# Altium PCB FPGA_Core_FX3.PcbDoc (part 1 of 2)
Units mm, origin at the board's own origin, x right, y up, seen from the top; angles counter-clockwise.
Board outline 27 x 27 mm, 6 copper layers (Signal_T, GND_T, PWR, Signal_INT, GND_B, Signal_B), stack 0.816 mm thick; 82 components, 137 nets, 677 pads, 343 vias.
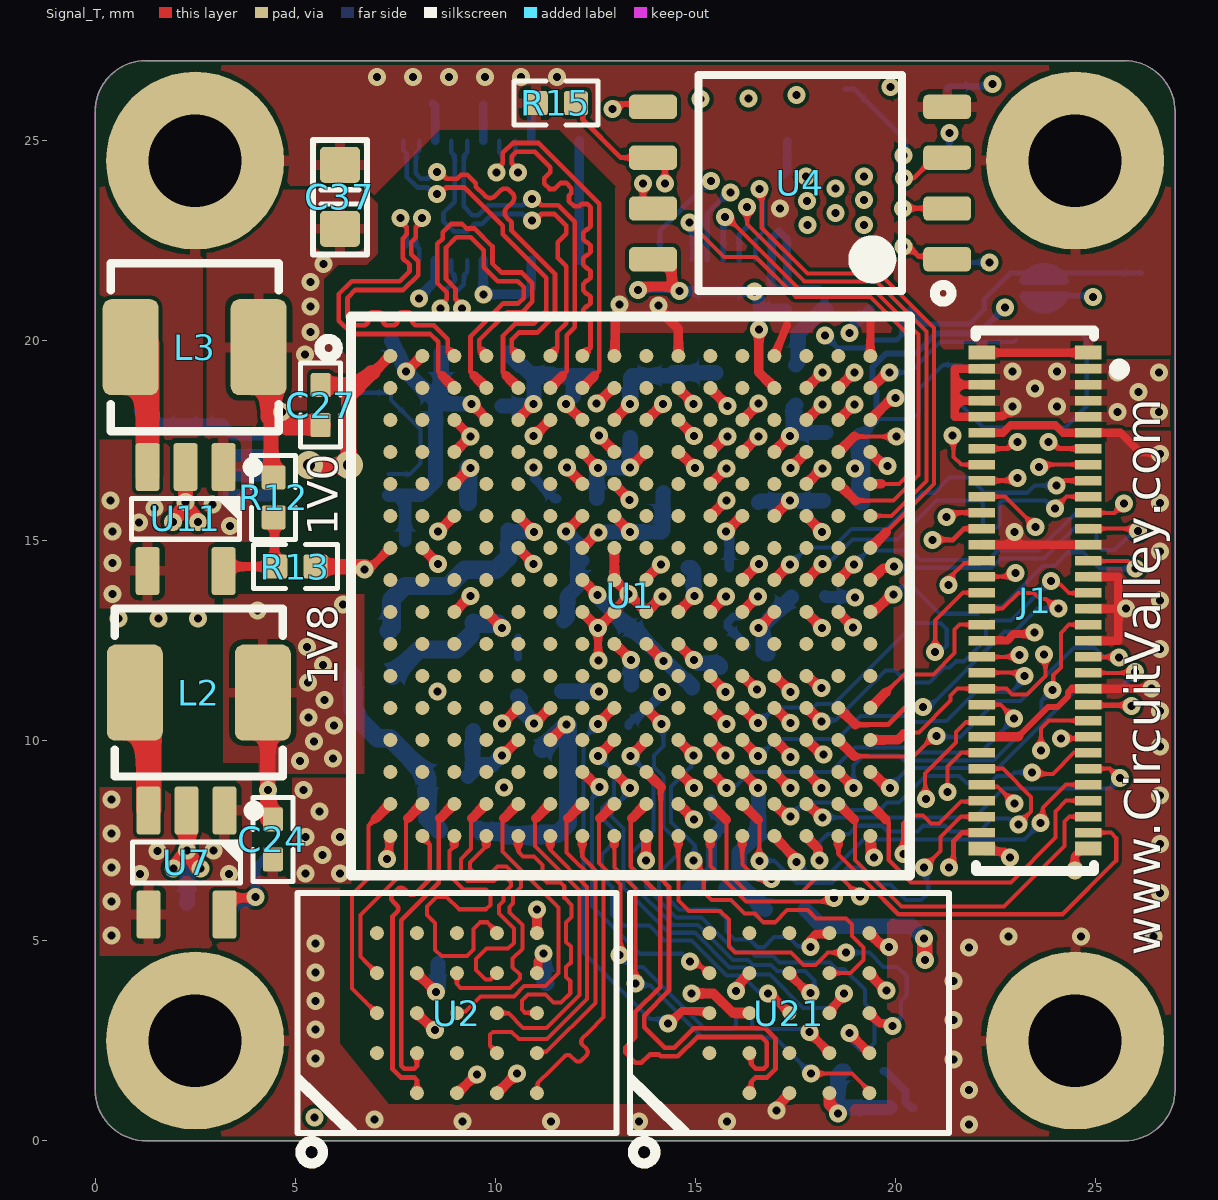
[diagram p0: Signal_T view]
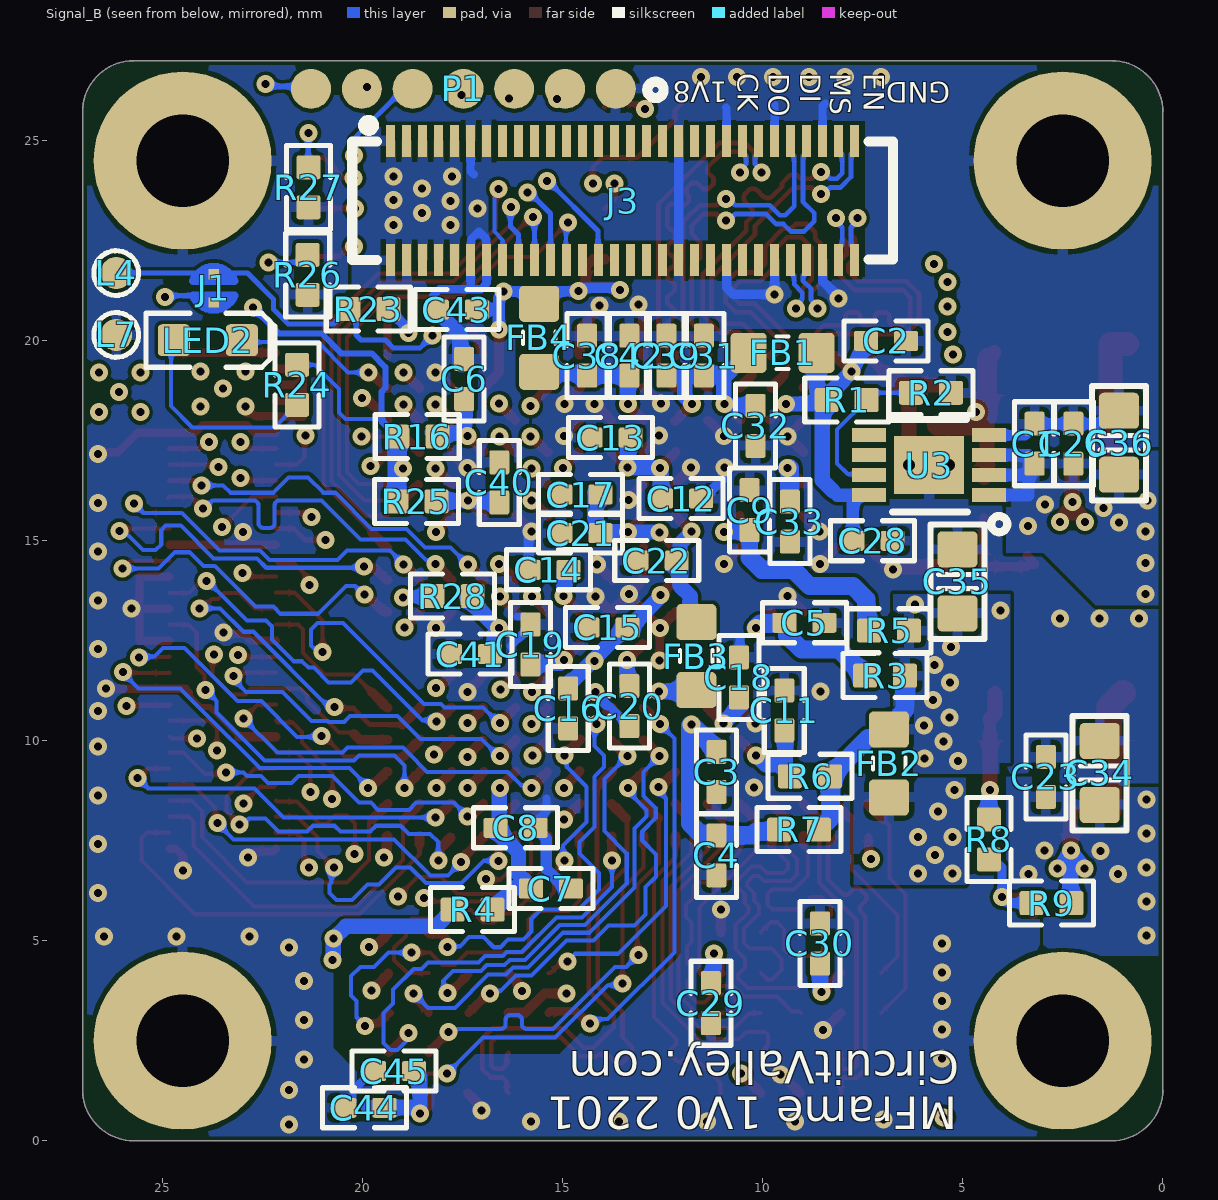
[diagram p1: Signal_B view, seen from below]
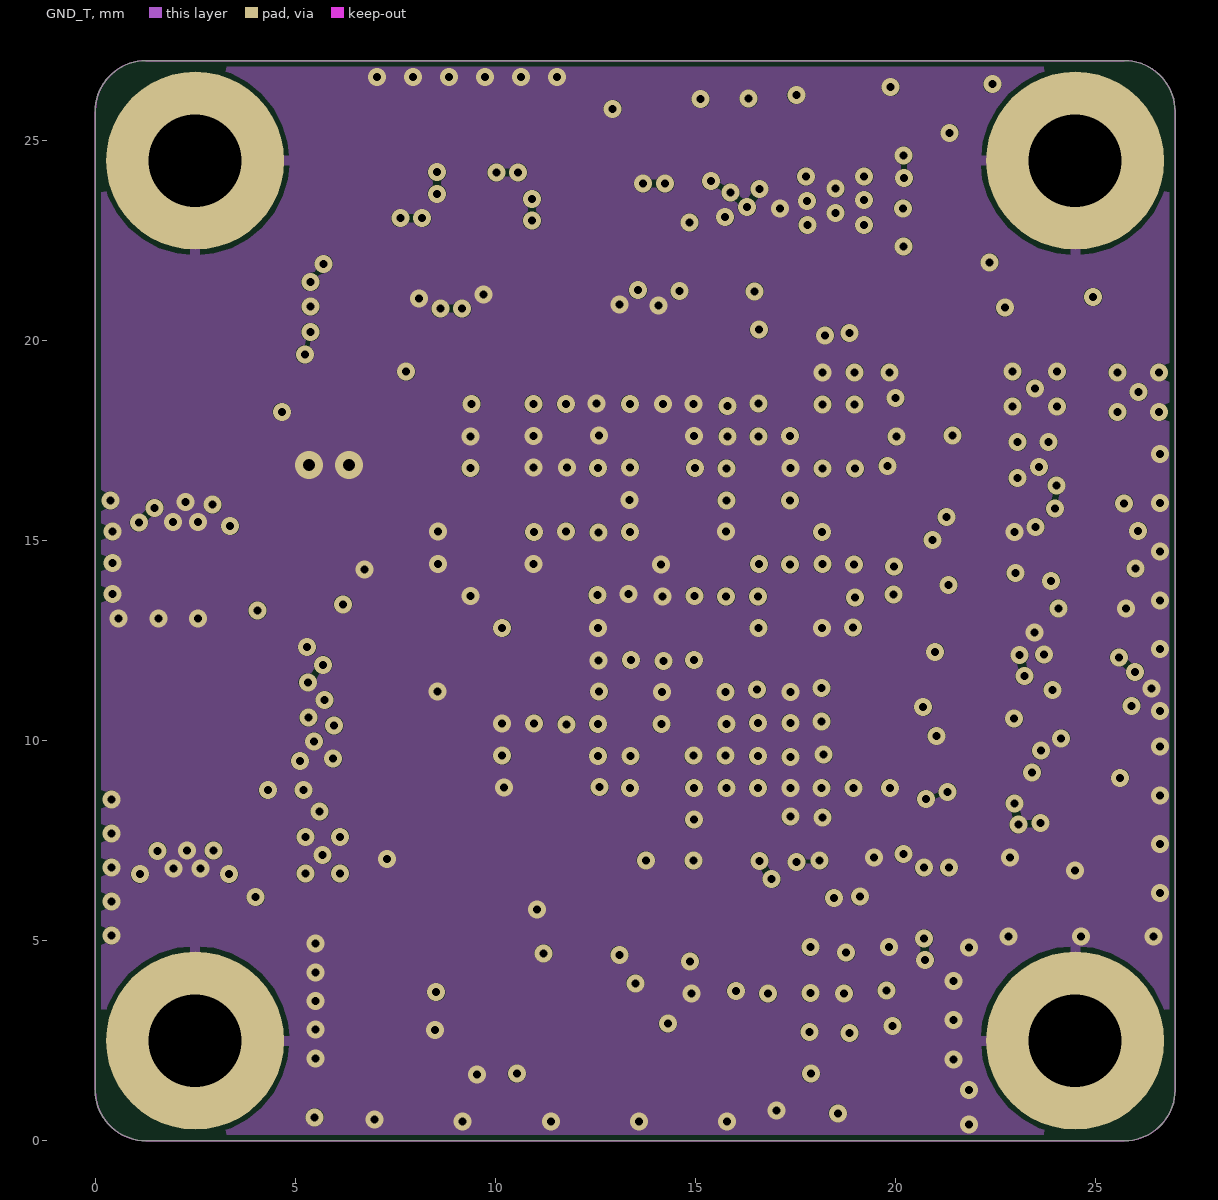
[diagram p2: GND_T]
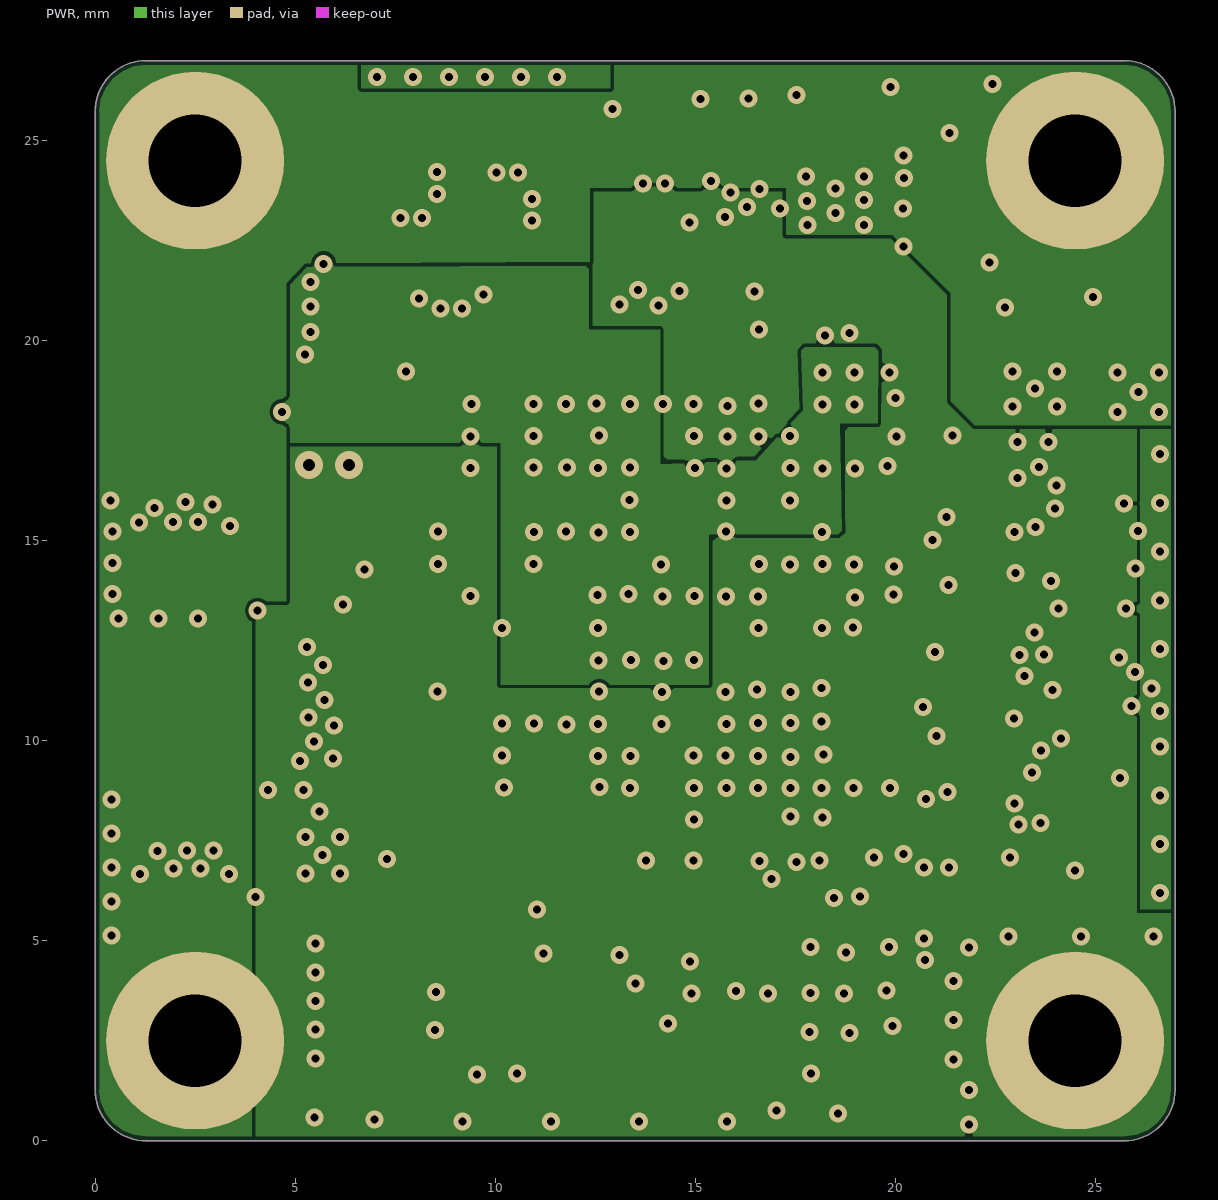
[diagram p3: PWR]
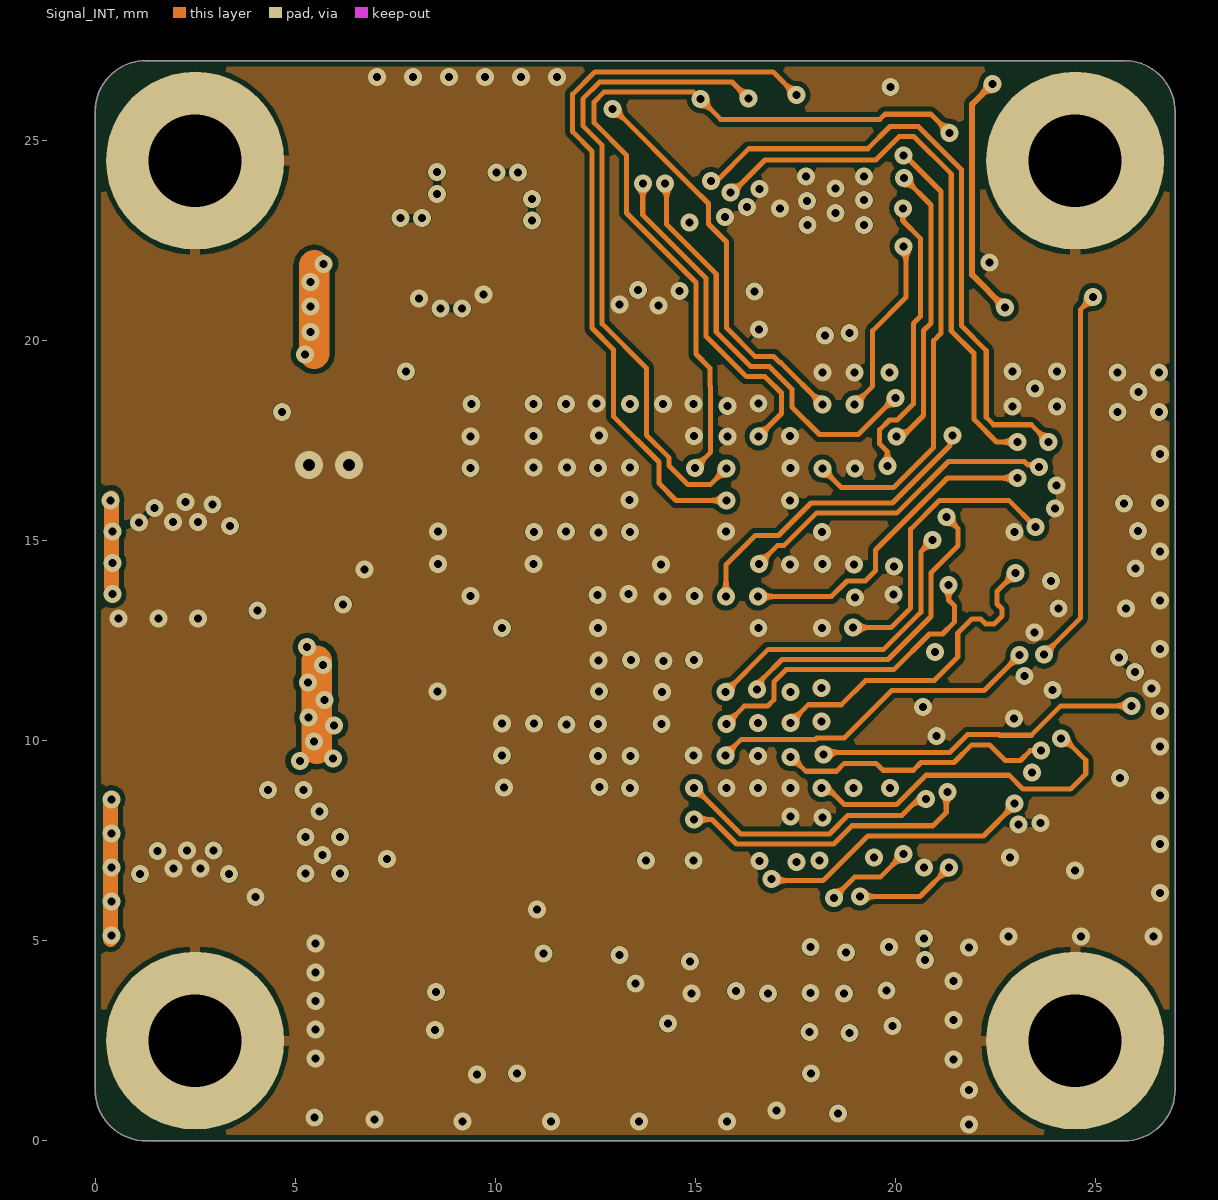
[diagram p4: Signal_INT]
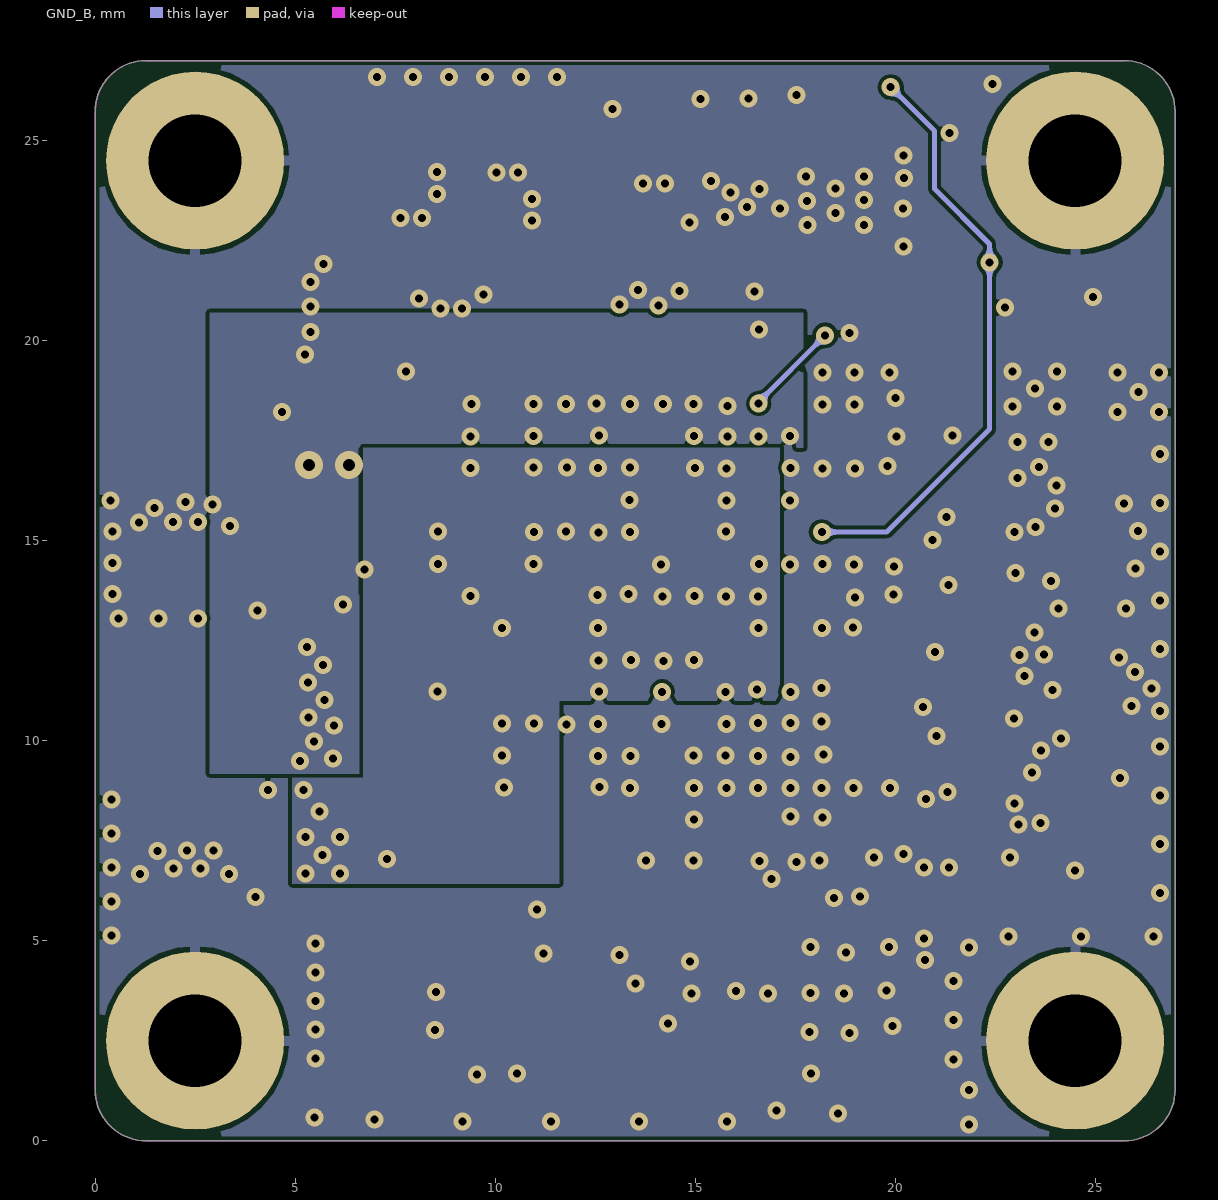
[diagram p5: GND_B]
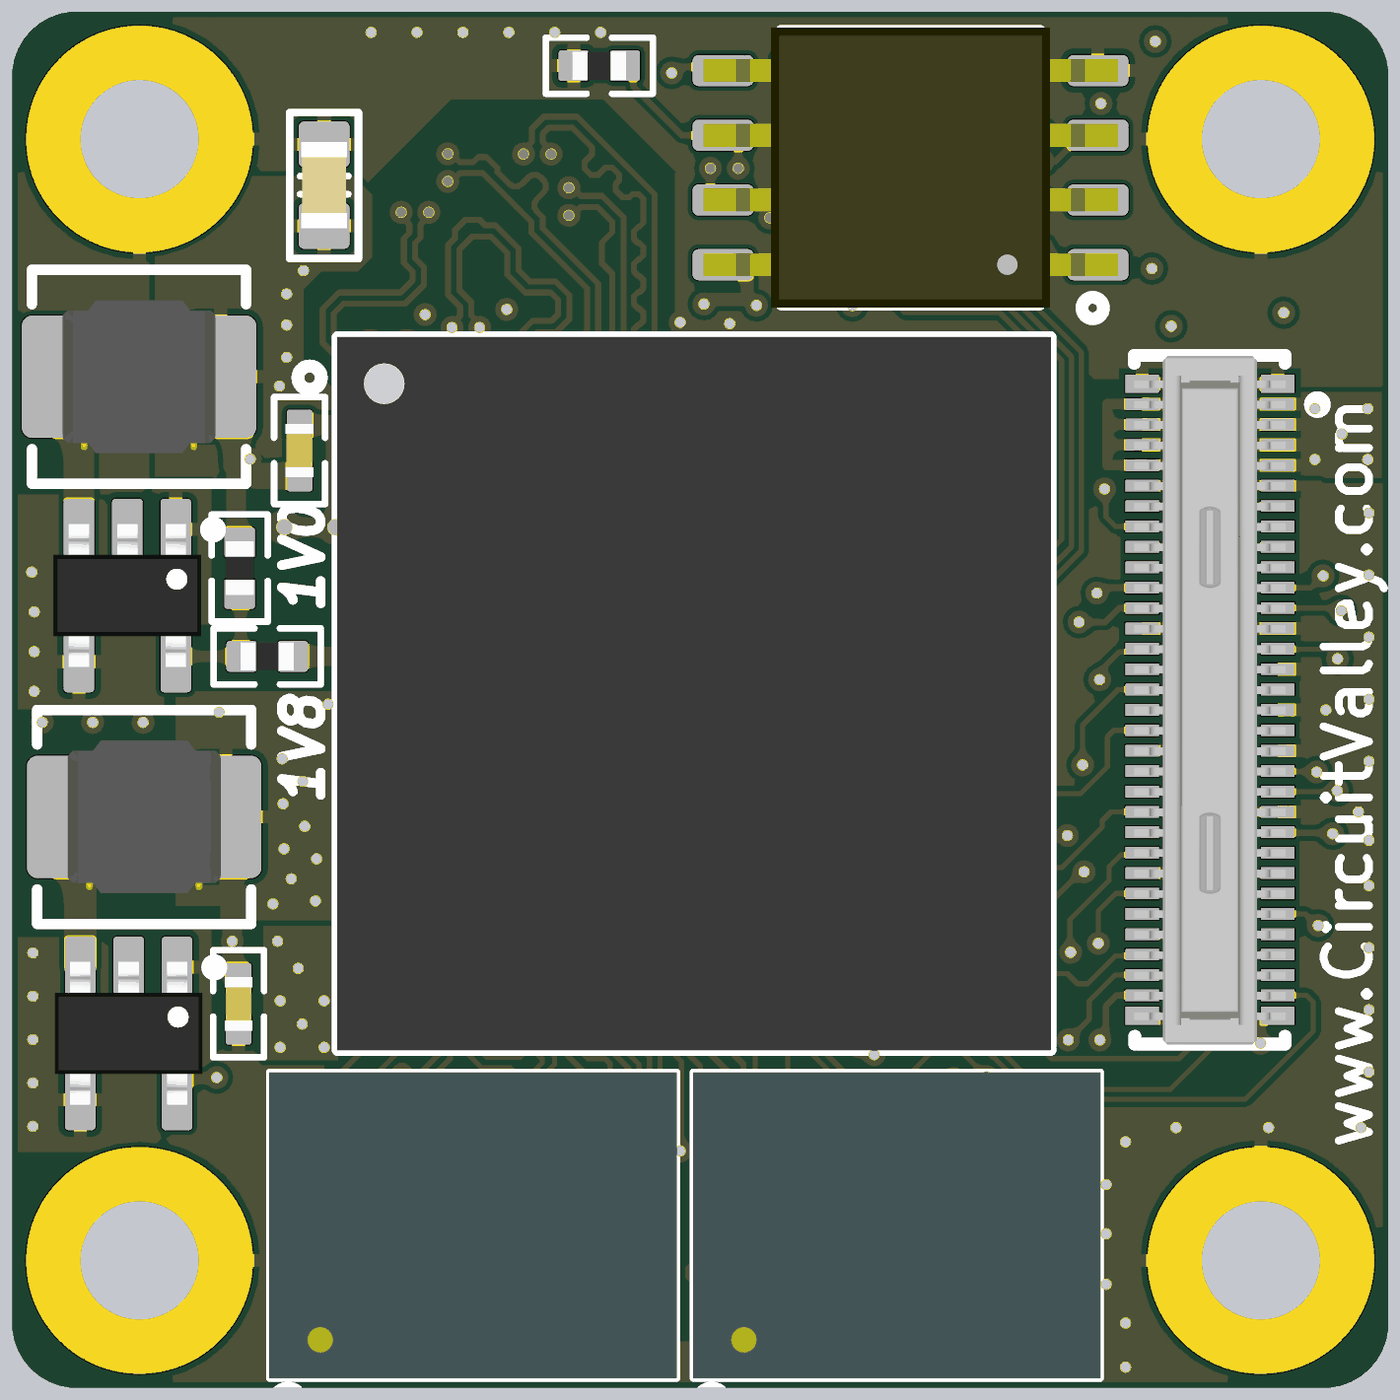
[diagram p7: 3D render of the assembled board from above, using the file's embedded part models]
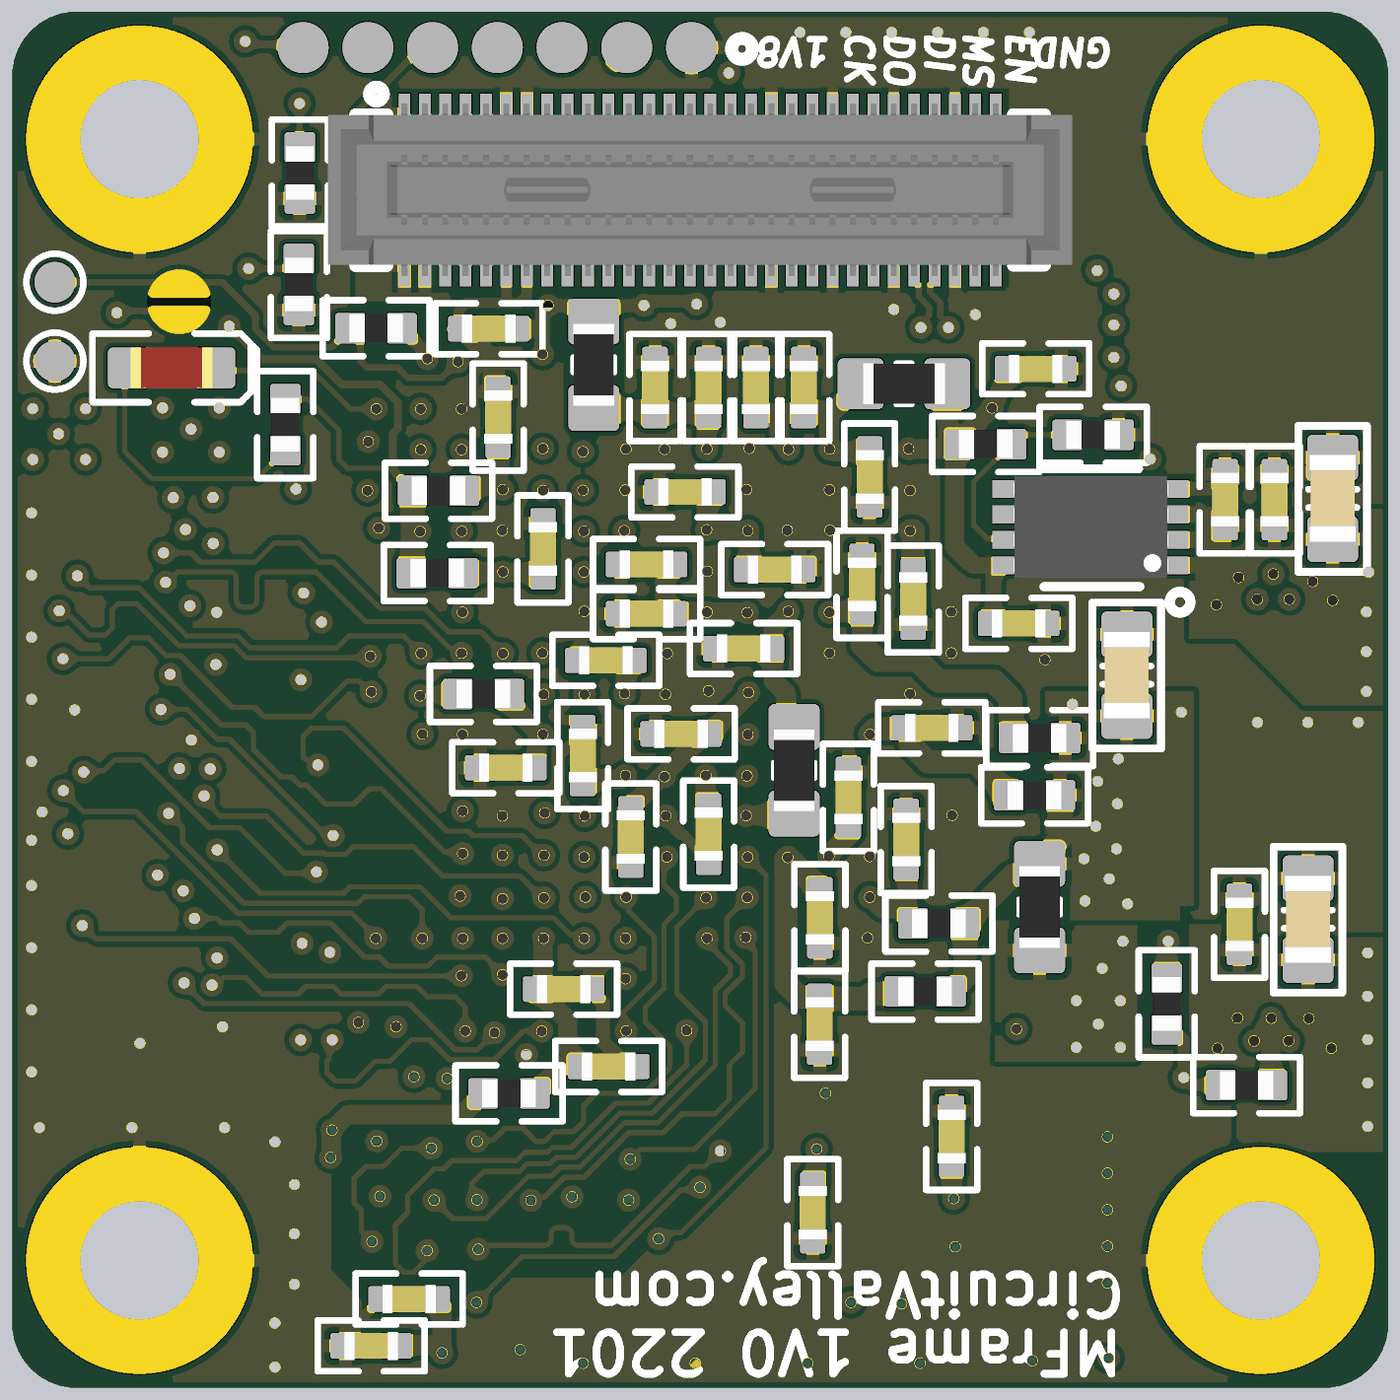
[diagram p8: 3D render of the assembled board from below, using the file's embedded part models]

## Layer stack, top to bottom
Top Solder: solder mask 0.0102, Solder Resist, Dk 3.5
Signal_T: signal copper 0.0356
Dielectric 2: prepreg 0.0711, PP-006, Dk 4.1
GND_T: signal copper 0.035
Dielectric 4: prepreg 0.0711, PP-006, Dk 4.1
PWR: signal copper 0.035
Dielectric 1: dielectric 0.32, FR-4, Dk 4.8
Signal_INT: signal copper 0.035
Dielectric 5: prepreg 0.0711, PP-006, Dk 4.1
GND_B: signal copper 0.035
Dielectric 3: prepreg 0.0711, PP-006, Dk 4.1
Signal_B: signal copper 0.0356
Bottom Solder: solder mask 0.0102, Solder Resist, Dk 3.5

## Board outline
0,1.27 0,25.73 cw(c1.27,25.73) 1.27,27 25.73,27 cw(c25.73,25.73) 27,25.73 27,1.27 cw(c25.73,1.27) 25.73,0 1.27,0 cw(c1.27,1.27)

## Design rules (kind name [scope] priority, off if disabled: settings)
Clearance Clearance_GNDT [OnLayer('GND_T')] p1: gap=0.127 ignorepadtopadclearanceinfootprint=FALSE
Clearance Clearance_INT [OnLayer('Signal_INT')] p2: gap=0.127 ignorepadtopadclearanceinfootprint=FALSE
Clearance [All] p3: gap=0.091 ignorepadtopadclearanceinfootprint=FALSE
Clearance Clearance_PWR [OnLayer('PWR')] p4: gap=0.127 ignorepadtopadclearanceinfootprint=FALSE
Clearance Clearance_GNDB [OnLayer('GND_B')] p5: gap=0.127 ignorepadtopadclearanceinfootprint=FALSE
ComponentClearance [All] p1: gap=0.254 collisioncheckmode=3 verticalgap=0 showdistances=FALSE
DiffPairsRouting [All] p1: maxlimit=0.102 minlimit=0.102 mostfreqgap=0.102 toplayer_minwidth=0.117 toplayer_maxwidth=0.254 toplayer_prefwidth=0.117 midlayer1_minwidth=0.117 midlayer1_maxwidth=0.254 midlayer1_prefwidth=0.117 midlayer2_minwidth=0.117 midlayer2_maxwidth=0.254 midlayer2_prefwidth=0.117 midlayer3_minwidth=0.117 midlayer3_maxwidth=0.254 midlayer3_prefwidth=0.117 midlayer4_minwidth=0.117 midlayer4_maxwidth=0.254 midlayer4_prefwidth=0.117 bottomlayer_minwidth=0.117 bottomlayer_maxwidth=0.254 bottomlayer_prefwidth=0.117 maxuncoupledlength=12.7
HoleSize [All] p1: absolutevalues=TRUE maxlimit=5 minlimit=0.025 maxpercent=80.000 minpercent=20.000
MatchedLengths Matched_GPIF_GRP [InNetClass('GPIF')] p1: tolerance=1.27 checknetsindiffpair=FALSE checkdiffpairvsdiffpair=TRUE checkxsignals=TRUE checkothers=TRUE
MinimumSolderMaskSliver [All] p1: minsoldermaskwidth=0.001
PlaneClearance [All] p1: clearance=0.152
PlaneConnect PlaneConnect_1 [All] p1: pad.planeconnectstyle=Relief pad.reliefexpansion=0.508 pad.reliefentries=4 pad.reliefconductorwidth=0.254 pad.reliefairgap=0.127 via.planeconnectstyle=Direct via.reliefexpansion=0.508 via.reliefentries=4 via.reliefconductorwidth=0.254 via.reliefairgap=0.254
PolygonConnect [All] p1: thpad.connectstyle=Relief thpad.reliefconductorwidth=0.254 thpad.reliefentries=4 thpad.polygonreliefangle="90 Angle" thpad.airgapwidth=0.127 smdpad.connectstyle=Relief smdpad.reliefconductorwidth=0.254 smdpad.reliefentries=4 smdpad.polygonreliefangle="90 Angle" smdpad.airgapwidth=0.127 via.connectstyle=Direct via.reliefconductorwidth=0.254 via.reliefentries=4 via.polygonreliefangle="90 Angle" via.airgapwidth=0.254
RoutingVias [All] p1: holewidth=0.2 width=0.45 viastyle="Through Hole" minholewidth=0.2 minwidth=0.45 maxholewidth=6.3 maxwidth=7
SilkToSilkClearance [All] p1: silktosilkclearance=0
SilkToSolderMaskClearance [IsPad] p1: minsilkscreentomaskgap=0 clearancetoexposedcopper=TRUE
SolderMaskExpansion [All] p1: expansion=0.025 istentingtop=FALSE
Width [All] p1: maxlimit=1.27 minlimit=0.09 preferedwidth=0.127 midlayer1_minwidth=0.127 midlayer2_minwidth=0.127 midlayer3_minwidth=0.127 midlayer4_minwidth=0.127 minimp=50.000000 maximp=50.000000 favimp=50.000000
22 further rules are at their usual default settings.

## Classes and differential pairs
component class fpga_flash: C6 C40 C41 C43 J1 L4 L7 LED2 P1 R15 R16 R23 R24 R25 R26 R27 R28 U4
net class GPIF: FPGA_CLK FPGA_CTL0 FPGA_CTL1 FPGA_D0 FPGA_D1 FPGA_D2 FPGA_D3 FPGA_D4 FPGA_D5 FPGA_D6 FPGA_D7 FPGA_D8 FPGA_D9 FPGA_D10 FPGA_D11 FPGA_D12 FPGA_D13 FPGA_D14 FPGA_D15 FPGA_D16 FPGA_D17 FPGA_D18 FPGA_D19 FPGA_D20 FPGA_D21 FPGA_D22 FPGA_D23 FPGA_D24 FPGA_D25 FPGA_D26 FPGA_D27 FPGA_D28 FPGA_D29 FPGA_D30 FPGA_D31
net class pram1: PS1_CK_N PS1_CK_P PS1_DQ0 PS1_DQ1 PS1_DQ2 PS1_DQ3 PS1_DQ4 PS1_DQ5 PS1_DQ6 PS1_DQ7 PS1_RW
net class pram0: PS0_CK_N PS0_CK_P PS0_DQ0 PS0_DQ1 PS0_DQ2 PS0_DQ3 PS0_DQ4 PS0_DQ5 PS0_DQ6 PS0_DQ7 PS0_RW
net class MIPI1: MIPI1_CLK_N MIPI1_CLK_P MIPI1_D0_N MIPI1_D0_P MIPI1_D1_N MIPI1_D1_P MIPI1_D2_N MIPI1_D2_P MIPI1_D3_N MIPI1_D3_P
net class MIPI0: MIPI0_CLK_N MIPI0_CLK_P MIPI0_D0_N MIPI0_D0_P MIPI0_D1_N MIPI0_D1_P MIPI0_D2_N MIPI0_D2_P MIPI0_D3_N MIPI0_D3_P
component class psram: C3 C4 C29 C30 C44 C45 R7 U2 U21
component class fpga_power: C12 C13 C14 C15 C16 C17 C18 C19 C20 C21 C22 C28 C31 C32 C33 C38 C39 C42 FB1 FB2 FB3 FB4
component class camera: J1 J3
component class power: C1 C2 C23 C24 C26 C27 C34 C35 C36 C37 L2 L3 R1 R2 R8 R9 R12 R13 U3 U7 U11
component class fpga_gpif: C5 C7 C8 C9 C11 R3 R4 R5 R6 U1
differential pair PS1_CK: +PS1_CK_P -PS1_CK_N
differential pair PS0_CK: +PS0_CK_P -PS0_CK_N
differential pair MIPI1_D3: +MIPI1_D3_P -MIPI1_D3_N
differential pair MIPI1_D2: +MIPI1_D2_P -MIPI1_D2_N
differential pair MIPI1_D1: +MIPI1_D1_P -MIPI1_D1_N
differential pair MIPI1_D0: +MIPI1_D0_P -MIPI1_D0_N
differential pair MIPI1_CLK: +MIPI1_CLK_P -MIPI1_CLK_N
differential pair MIPI0_D3: +MIPI0_D3_P -MIPI0_D3_N
differential pair MIPI0_D2: +MIPI0_D2_P -MIPI0_D2_N
differential pair MIPI0_D1: +MIPI0_D1_P -MIPI0_D1_N
differential pair MIPI0_D0: +MIPI0_D0_P -MIPI0_D0_N
differential pair MIPI0_CLK: +MIPI0_CLK_P -MIPI0_CLK_N

## Components (designator, comment, footprint, x,y, rotation, side; value= is the part's Value field where it differs from the comment)
C1 "100n" CAPC1005N 3.202,17.424 r270 bottom
C2 "1uf" CAPC1005N 6.916,19.993 r0 bottom
C3 "100n" CAPC1005N 11.152,9.222 r90 bottom
C4 "100n" CAPC1005N 11.158,7.133 r90 bottom
C5 "100n" CAPC1005N 8.957,12.949 r0 bottom
C6 "100n" CAPC1005N 17.464,19.045 r270 bottom
C7 "100n" CAPC1005N 15.297,6.304 r0 bottom
C8 "100n" CAPC1005N 16.18,7.823 r0 bottom
C9 "100n" CAPC1005N 10.326,15.764 r270 bottom
C11 "100n" CAPC1005N 9.461,10.758 r270 bottom
C12 "100n" CAPC1005N 12.04,16.053 r0 bottom
C13 "100n" CAPC1005N 13.8,17.577 r180 bottom
C14 "100n" CAPC1005N 15.353,14.273 r180 bottom
C15 "100n" CAPC1005N 13.876,12.831 r180 bottom
C16 "100n" CAPC1005N 14.862,10.807 r90 bottom
C17 "100n" CAPC1005N 14.554,16.154 r180 bottom
C18 "100n" CAPC1005N 10.593,11.584 r270 bottom
C19 "100n" CAPC1005N 15.805,12.405 r270 bottom
C20 "100n" CAPC1005N 13.334,10.863 r90 bottom
C21 "100n" CAPC1005N 14.554,15.189 r180 bottom
C22 "100n" CAPC1005N 12.649,14.503 r180 bottom
C23 "100n" CAPC1005N 2.921,9.093 r270 bottom
C24 "100n" CAPC1005N 4.443,7.535 r90 top
C26 "100n" CAPC1005N 2.235,17.424 r270 bottom
C27 "100n" CAPC1005N 5.639,18.39 r270 top
C28 "100n" CAPC1005N 7.25,14.999 r0 bottom
C29 "100n" CAPC1005N 11.294,3.437 r90 bottom
C30 "100n" CAPC1005N 8.568,4.931 r270 bottom
C31 "100n" CAPC1005N 11.47,19.625 r270 bottom
C32 "100n" CAPC1005N 10.176,17.871 r90 bottom
C33 "100n" CAPC1005N 9.322,15.477 r90 bottom
C34 "approved sub OK" CAPC1608N 1.575,9.195 r90 bottom value=10u
C35 "approved sub OK" CAPC1608N 5.131,13.983 r90 bottom value=10u
C36 "approved sub OK" CAPC1608N 1.092,17.45 r90 bottom value=10u
C37 "approved sub OK" CAPC1608N 6.121,23.597 r90 top value=10u
C38 "100n" CAPC1005N 14.388,19.625 r270 bottom
C39 "100n" CAPC1005N 12.407,19.625 r270 bottom
C40 "100n" CAPC1005N 16.586,16.459 r270 bottom
C41 "100n" CAPC1005N 17.315,12.167 r180 bottom
C42 "100n" CAPC1005N 13.335,19.625 r270 bottom
C43 "100n" CAPC1005N 17.648,20.78 r180 bottom
C44 "100n" CAPC1005N 19.957,0.824 r180 bottom
C45 "100n" CAPC1005N 19.213,1.742 r180 bottom
FB1 "Ferrite" INDC1608N 9.502,19.698 r180 bottom
FB2 "Ferrite" INDC1608N 6.842,9.432 r90 bottom
FB3 "Ferrite" INDC1608N 11.659,12.116 r270 bottom
FB4 "Ferrite" INDC1608N 15.588,20.072 r90 bottom
J1 "SMD Jumper" SMD_Jumper 23.724,21.311 r270 bottom
J1 "DF40C-60DP-0.4V(51)" DF40C-60DP-0.4V 23.5,13.5 r270 top locked
J3 "DF40HC(4.0)-60DS-0.4V(51)" DF40HC(4.0)-60DS-0.4V(51) 13.503,23.504 r180 bottom locked
L2 "2u2" FDSD0420-H-2R2M 2.591,11.201 r0 top
L3 "2u2" FDSD0420-H-2R2M 2.489,19.837 r0 top
L4 "TestPoint" SMD_test_point 26.162,21.692 r180 bottom
L7 "TestPoint" SMD_test_point 26.162,20.144 r270 bottom
LED2 "Red" LED-0603-RED 23.871,20.012 r180 bottom
P1 "Header" SMD_Solder_points_1.27_x7 17.482,26.295 r0 bottom
R1 "Thick Film" RESC1005N 7.899,18.517 r0 bottom value=0R
R2 "Thick Film" RESC1005N 5.791,18.698 r0 bottom value=0R
R3 "Thick Film" RESC1005N 6.941,11.626 r0 bottom value=0R
R4 "Thick Film" RESC1005N 17.253,5.777 r180 bottom value=0R
R5 "Thick Film" RESC1005N 6.841,12.75 r0 bottom value=0R
R6 "Thick Film" RESC1005N 8.819,9.111 r0 bottom value=0R
R7 "Thick Film" RESC1005N 9.09,7.776 r180 bottom value=0R
R8 "Thick Film" RESC1005N 4.347,7.533 r90 bottom value=30K
R9 "Thick Film" RESC1005N 2.781,5.939 r180 bottom value=15K
R12 "Thick Film" RESC1005N 4.464,16.083 r90 top value=30K
R13 "Thick Film" RESC1005N 5.004,14.351 r180 top value=27K
R15 "Thick Film" RESC1005N 11.519,25.94 r180 top value=0R
R16 "Thick Film" RESC1005N 18.636,17.602 r180 bottom value=0R
R23 "Thick Film" RESC1005N 19.861,20.789 r180 bottom value=0R
R24 "Thick Film" RESC1005N 21.641,18.898 r270 bottom value=0R
R25 "Thick Film" RESC1005N 18.659,15.985 r180 bottom value=0R
R26 "Thick Film" RESC1005N 21.375,21.647 r90 bottom value=0R
R27 "Thick Film" RESC1005N 21.355,23.835 r90 bottom value=0R
R28 "Thick Film" RESC1005N 17.755,13.614 r180 bottom value=0R
U1 "LIFCL-40-9BG256C" Lattice_256_CABGA 13.379,13.62 r0 top locked
U2 "W957D8MFYA5I" TFBGA24 9.045,3.191 r90 top locked
U3 "MCP1725-1802E/MC" DFN8_3x2 5.841,16.887 r0 bottom
U4 "SST26WF064C / MX25U12832F" SOP8 17.625,23.941 r180 top
U7 "AP3417C" SOT23-5 2.286,6.955 r270 top
U11 "AP3417C" SOT23-5 2.261,15.545 r270 top
U21 "W957D8MFYA5I" TFBGA24 17.357,3.191 r90 top locked

## Footprints (in the part's own frame and the unit in brackets; to place one, negate y for a bottom-side part, rotate by r counter-clockwise, add the part's x,y. Pads: shape width x height; smd on the part's side, far side on the other; paste and mask are expansions set on the pad)
CAPC1005N [mm] "Chip Capacitor, Body 1.0x0.5mm, 0402, IPC Medium Density"
  round 0.2 on Mech14: 0(0,0)
  rrect20% 0.6x0.5 smd: 1(-0.5,0) 2(0.5,0)
  Signal_T pour cut-out: -0.2,0.35 0.2,0.35 0.2,-0.35 -0.2,-0.35
  silkscreen extent -1.05,-0.5 1.05,0.5, body extent -0.52,-0.27 0.53,0.28, height 0.55
CAPC1608N [mm] "Chip Capacitor, Body 1.6x0.8mm, 0603, IPC Medium Density"
  round 0.254 on Mech14: 0(0,0)
  rrect25% 0.9x1 smd: 1(-0.8,0) 2(0.8,0)
  silkscreen extent -1.44,-0.67 1.42,0.68, body extent -0.85,-0.45 0.85,0.45, height 0.89
DF40C-60DP-0.4V [mm] "Hiros 60Pin 0.4mm Connector Used with Camera Sensors"
  rect 0.23x0.66 smd: 1(-5.8,1.33) 2(-5.8,-1.33) 3(-5.4,1.33) 4(-5.4,-1.33) 5(-5,1.33) 6(-5,-1.33) 7(-4.6,1.33) 8(-4.6,-1.33) 9(-4.2,1.33) 10(-4.2,-1.33) 11(-3.8,1.33) 12(-3.8,-1.33) 13(-3.4,1.33) 14(-3.4,-1.33) 15(-3,1.33) 16(-3,-1.33) 17(-2.6,1.33) 18(-2.6,-1.33) 19(-2.2,1.33) 20(-2.2,-1.33) 21(-1.8,1.33) 22(-1.8,-1.33) 23(-1.4,1.33) 24(-1.4,-1.33) 25(-1,1.33) 26(-1,-1.33) 27(-0.6,1.33) 28(-0.6,-1.33) 29(-0.2,1.33) 30(-0.2,-1.33) 31(0.2,1.33) 32(0.2,-1.33) 33(0.6,1.33) 34(0.6,-1.33) 35(1,1.33) 36(1,-1.33) 37(1.4,1.33) 38(1.4,-1.33) 39(1.8,1.33) 40(1.8,-1.33) 41(2.2,1.33) 42(2.2,-1.33) 43(2.6,1.33) 44(2.6,-1.33) 45(3,1.33) 46(3,-1.33) 47(3.4,1.33) 48(3.4,-1.33) 49(3.8,1.33) 50(3.8,-1.33) 51(4.2,1.33) 52(4.2,-1.33) 53(4.6,1.33) 54(4.6,-1.33) 55(5,1.33) 56(5,-1.33) 57(5.4,1.33) 58(5.4,-1.33) 59(5.8,1.33) 60(5.8,-1.33)
  rect 0.35x0.66 smd: S1(-6.2,-1.33) S1(-6.2,1.33) S1(6.2,-1.33) S1(6.2,1.33)
  silkscreen extent -6.76,-1.48 6.76,2.24, body extent -6.75,-1.49 6.77,1.48, height 1.1
DF40HC(4.0)-60DS-0.4V(51) [mm] "Hiros 60Pin 0.4mm Connector Used with Camera Sensors"
  rect 0.23x0.8 smd: 1(-5.8,1.49) 2(-5.8,-1.49) 3(-5.4,1.49) 4(-5.4,-1.49) 5(-5,1.49) 6(-5,-1.49) 7(-4.6,1.49) 8(-4.6,-1.49) 9(-4.2,1.49) 10(-4.2,-1.49) 11(-3.8,1.49) 12(-3.8,-1.49) 13(-3.4,1.49) 14(-3.4,-1.49) 15(-3,1.49) 16(-3,-1.49) 17(-2.6,1.49) 18(-2.6,-1.49) 19(-2.2,1.49) 20(-2.2,-1.49) 21(-1.8,1.49) 22(-1.8,-1.49) 23(-1.4,1.49) 24(-1.4,-1.49) 25(-1,1.49) 26(-1,-1.49) 27(-0.6,1.49) 28(-0.6,-1.49) 29(-0.2,1.49) 30(-0.2,-1.49) 31(0.2,1.49) 32(0.2,-1.49) 33(0.6,1.49) 34(0.6,-1.49) 35(1,1.49) 36(1,-1.49) 37(1.4,1.49) 38(1.4,-1.49) 39(1.8,1.49) 40(1.8,-1.49) 41(2.2,1.49) 42(2.2,-1.49) 43(2.6,1.49) 44(2.6,-1.49) 45(3,1.49) 46(3,-1.49) 47(3.4,1.49) 48(3.4,-1.49) 49(3.8,1.49) 50(3.8,-1.49) 51(4.2,1.49) 52(4.2,-1.49) 53(4.6,1.49) 54(4.6,-1.49) 55(5,1.49) 56(5,-1.49) 57(5.4,1.49) 58(5.4,-1.49) 59(5.8,1.49) 60(5.8,-1.49)
  silkscreen extent -6.76,-1.48 6.76,2.01, body extent -7.3,-1.69 7.3,1.69, height 3.91
DFN8_3x2 [mm] "MCP1725"
  rect 0.85x0.35 smd: 1(-1.5,0.75) 2(-1.5,0.25) 3(-1.5,-0.25) 4(-1.5,-0.75) 5(1.5,-0.75) 6(1.5,-0.25) 7(1.5,0.25) 8(1.5,0.75)
  rect 1.75x1.45 smd: 9(0,0)
  silkscreen extent -1.95,-1.14 0.94,1.67, body extent -1.53,-1 1.51,1, height 0.91
FDSD0420-H-2R2M [mm] "Murata"
  rrect30% 1.4x2.4 smd: 1(-1.6,0) 2(1.6,0)
  silkscreen extent -2.1,-2.1 2.1,2.1, body extent -1.5,-1.5 1.5,1.5, height 1.35
INDC1608N [mm] "Chip bead, Body 1.6x0.8mm, 0603, IPC Medium Density"
  round 0.254 on Mech14: 0(0,0)
  rrect25% 0.9x1 smd: 1(-0.85,0) 2(0.85,0)
  Signal_T pour cut-out: -0.4,0.6 0.4,0.6 0.4,-0.6 -0.4,-0.6
  silkscreen extent -0.15,-0.41 0.15,0.41, body extent -0.8,-0.4 0.8,0.4, height 0.79
Lattice_256_CABGA [mm] "Lattice ECP5 256 CABGA 0.8"
  round 0.35 smd: A1(-6,6) A2(-5.2,6) A3(-4.4,6) A4(-3.6,6) A5(-2.8,6) A6(-2,6) A7(-1.2,6) A8(-0.4,6) A9(0.4,6) A10(1.2,6) A11(2,6) A12(2.8,6) A13(3.6,6) A14(4.4,6) A15(5.2,6) A16(6,6) B1(-6,5.2) B2(-5.2,5.2) B3(-4.4,5.2) B4(-3.6,5.2) B5(-2.8,5.2) B6(-2,5.2) B7(-1.2,5.2) B8(-0.4,5.2) B9(0.4,5.2) B10(1.2,5.2) B11(2,5.2) B12(2.8,5.2) B13(3.6,5.2) B14(4.4,5.2) B15(5.2,5.2) B16(6,5.2) C1(-6,4.4) C2(-5.2,4.4) C3(-4.4,4.4) C4(-3.6,4.4) C5(-2.8,4.4) C6(-2,4.4) C7(-1.2,4.4) C8(-0.4,4.4) C9(0.4,4.4) C10(1.2,4.4) C11(2,4.4) C12(2.8,4.4) C13(3.6,4.4) C14(4.4,4.4) C15(5.2,4.4) C16(6,4.4) D1(-6,3.6) D2(-5.2,3.6) D3(-4.4,3.6) D4(-3.6,3.6) D5(-2.8,3.6) D6(-2,3.6) D7(-1.2,3.6) D8(-0.4,3.6) D9(0.4,3.6) D10(1.2,3.6) D11(2,3.6) D12(2.8,3.6) D13(3.6,3.6) D14(4.4,3.6) D15(5.2,3.6) D16(6,3.6) E1(-6,2.8) E2(-5.2,2.8) E3(-4.4,2.8) E4(-3.6,2.8) E5(-2.8,2.8) E6(-2,2.8) E7(-1.2,2.8) E8(-0.4,2.8) E9(0.4,2.8) E10(1.2,2.8) E11(2,2.8) E12(2.8,2.8) E13(3.6,2.8) E14(4.4,2.8) E15(5.2,2.8) E16(6,2.8) F1(-6,2) F2(-5.2,2) F3(-4.4,2) F4(-3.6,2) F5(-2.8,2) F6(-2,2) F7(-1.2,2) F8(-0.4,2) F9(0.4,2) F10(1.2,2) F11(2,2) F12(2.8,2) F13(3.6,2) F14(4.4,2) F15(5.2,2) F16(6,2) G1(-6,1.2) G2(-5.2,1.2) G3(-4.4,1.2) G4(-3.6,1.2) G5(-2.8,1.2) G6(-2,1.2) G7(-1.2,1.2) G8(-0.4,1.2) G9(0.4,1.2) G10(1.2,1.2) G11(2,1.2) G12(2.8,1.2) G13(3.6,1.2) G14(4.4,1.2) G15(5.2,1.2) G16(6,1.2) H1(-6,0.4) H2(-5.2,0.4) H3(-4.4,0.4) H4(-3.6,0.4) H5(-2.8,0.4) H6(-2,0.4) H7(-1.2,0.4) H8(-0.4,0.4) H9(0.4,0.4) H10(1.2,0.4) H11(2,0.4) H12(2.8,0.4) H13(3.6,0.4) H14(4.4,0.4) H15(5.2,0.4) H16(6,0.4) J1(-6,-0.4) J2(-5.2,-0.4) J3(-4.4,-0.4) J4(-3.6,-0.4) J5(-2.8,-0.4) J6(-2,-0.4) J7(-1.2,-0.4) J8(-0.4,-0.4) J9(0.4,-0.4) J10(1.2,-0.4) J11(2,-0.4) J12(2.8,-0.4) J13(3.6,-0.4) J14(4.4,-0.4) J15(5.2,-0.4) J16(6,-0.4) K1(-6,-1.2) K2(-5.2,-1.2) K3(-4.4,-1.2) K4(-3.6,-1.2) K5(-2.8,-1.2) K6(-2,-1.2) K7(-1.2,-1.2) K8(-0.4,-1.2) K9(0.4,-1.2) K10(1.2,-1.2) K11(2,-1.2) K12(2.8,-1.2) K13(3.6,-1.2) K14(4.4,-1.2) K15(5.2,-1.2) K16(6,-1.2) L1(-6,-2) L2(-5.2,-2) L3(-4.4,-2) L4(-3.6,-2) L5(-2.8,-2) L6(-2,-2) L7(-1.2,-2) L8(-0.4,-2) L9(0.4,-2) L10(1.2,-2) L11(2,-2) L12(2.8,-2) L13(3.6,-2) L14(4.4,-2) L15(5.2,-2) L16(6,-2) M1(-6,-2.8) M2(-5.2,-2.8) M3(-4.4,-2.8) M4(-3.6,-2.8) M5(-2.8,-2.8) M6(-2,-2.8) M7(-1.2,-2.8) M8(-0.4,-2.8) M9(0.4,-2.8) M10(1.2,-2.8) M11(2,-2.8) M12(2.8,-2.8) M13(3.6,-2.8) M14(4.4,-2.8) M15(5.2,-2.8) M16(6,-2.8) N1(-6,-3.6) N2(-5.2,-3.6) N3(-4.4,-3.6) N4(-3.6,-3.6) N5(-2.8,-3.6) N6(-2,-3.6) N7(-1.2,-3.6) N8(-0.4,-3.6) N9(0.4,-3.6) N10(1.2,-3.6) N11(2,-3.6) N12(2.8,-3.6) N13(3.6,-3.6) N14(4.4,-3.6) N15(5.2,-3.6) N16(6,-3.6) P1(-6,-4.4) P2(-5.2,-4.4) P3(-4.4,-4.4) P4(-3.6,-4.4) P5(-2.8,-4.4) P6(-2,-4.4) P7(-1.2,-4.4) P8(-0.4,-4.4) P9(0.4,-4.4) P10(1.2,-4.4) P11(2,-4.4) P12(2.8,-4.4) P13(3.6,-4.4) P14(4.4,-4.4) P15(5.2,-4.4) P16(6,-4.4) R1(-6,-5.2) R2(-5.2,-5.2) R3(-4.4,-5.2) R4(-3.6,-5.2) R5(-2.8,-5.2) R6(-2,-5.2) R7(-1.2,-5.2) R8(-0.4,-5.2) R9(0.4,-5.2) R10(1.2,-5.2) R11(2,-5.2) R12(2.8,-5.2) R13(3.6,-5.2) R14(4.4,-5.2) R15(5.2,-5.2) R16(6,-5.2) T1(-6,-6) T2(-5.2,-6) T3(-4.4,-6) T4(-3.6,-6) T5(-2.8,-6) T6(-2,-6) T7(-1.2,-6) T8(-0.4,-6) T9(0.4,-6) T10(1.2,-6) T11(2,-6) T12(2.8,-6) T13(3.6,-6) T14(4.4,-6) T15(5.2,-6) T16(6,-6)
  silkscreen extent -7.77,-6.98 6.98,6.98, body extent -7,-7 7,7, height 1.4
LED-0603-RED [mm]
  round 0.254 on Mech14: 0(0,0)
  rrect25% 0.8x0.8 smd: A(-0.85,0) K(0.85,0)
  Signal_T pour cut-out: -0.5,0.5 0.5,0.5 0.5,-0.5 -0.5,-0.5
  silkscreen extent -1.55,-0.67 1.68,0.67, body extent -0.8,-0.4 0.8,0.4, height 0.75
RESC1005N [mm] "Chip Resistor, Body 1.0x0.5mm, EIA 0402, IPC Medium Density"
  round 0.2 on Mech14: 0(0,0)
  rrect20% 0.6x0.6 smd: 1(-0.5,0) 2(0.5,0)
  Signal_T pour cut-out: -0.2,0.35 0.2,0.35 0.2,-0.35 -0.2,-0.35
  silkscreen extent -1.05,-0.55 1.05,0.55, body extent -0.52,-0.27 0.53,0.28, height 0.4
SMD_Jumper [mil]
  rect 10x10 smd paste-300: 1(-13.86,0.05)
  rect 10x10 smd paste-30: 2(14.14,0.05)
  Signal_T region: -8,18 -10,18 -20,8 -20,-9 -11,-18 -8,-18
  Signal_T region: 8,18 10,18 20,8 20,-9 11,-18 8,-18
  Signal_T lines w8: 7.17,20.43 cw(c-1,0) 7.17,-20.43 7.17,0 7.17,0.05 7.17,20.43 ; -7.17,20.43 ccw(c1,0) -7.17,-20.43 -7.17,20.43
SMD_Solder_points_1.27_x7 [mm]
  round 1 smd: 1(-3.81,0) 2(-2.54,0) 3(-1.27,0) 4(0,0) 5(1.27,0) 6(2.54,0) 7(3.81,0)
  silkscreen extent -5,-0.18 -4.6,0.23
SMD_test_point [mm]
  round 0.8 smd: 1(0,0)
  silkscreen extent -0.56,-0.56 0.56,0.56, body extent -0.56,-0.3 0.3,0.3, height 1.52
SOP8 [mm] "MX25L12833F"
  rrect40% 1.2x0.61 smd: 1(-3.677,1.905) 2(-3.677,0.635) 3(-3.677,-0.635) 4(-3.677,-1.905) 5(3.677,-1.905) 6(3.677,-0.635) 7(3.677,0.635) 8(3.677,1.905)
  silkscreen extent -3.79,-2.7 2.54,2.96, body extent -4.07,-2.75 4.07,2.74, height 1.9
SOT23-5 [mm]
  round 0.5 on Mech14: 0(0,0)
  rrect25% 1.2x0.6 smd: 1(-1.3,0.95) 2(-1.3,0) 3(-1.3,-0.95) 4(1.3,-0.95) 5(1.3,0.95)
  silkscreen extent -1.42,-1.35 0.51,1.81, body extent -1.4,-1.45 1.4,1.45, height 1.44
TFBGA24 [mm] "W957D8MFYA5I"
  round 0.35 smd: A2(-1,2) A3(0,2) A4(1,2) A5(2,2) B1(-2,1) B2(-1,1) B3(0,1) B4(1,1) B5(2,1) C1(-2,0) C2(-1,0) C3(0,0) C4(1,0) C5(2,0) D1(-2,-1) D2(-1,-1) D3(0,-1) D4(1,-1) D5(2,-1) E1(-2,-2) E2(-1,-2) E3(0,-2) E4(1,-2) E5(2,-2)
  silkscreen extent -3.76,-3.99 3,3.99, body extent -3,-4 3,4, height 1.1

## Part data
C1 C2 C3 C4 C5 C6 C7 C8 C9 C11 C12 C13 C14 C15 C16 C17 C18 C19 C20 C21 C22 C23 C24 C26 C27 C28 C29 C30 C31 C32 C33 C38 C39 C40 C41 C42 C43 C44 C45: library part CAPC_10n_0402_16V_10%, "Capacitor SMD Cer 10nF 10% 16V X7R 0402", Manufacturer 1="AVX Corporation", Manufacturer 2=Yageo, Manufacturer Part Number 1=0402YC103KAT2A, Manufacturer Part Number 2=CC0402KRX7R7BB103, Operating Temperature="-55°C ~ 125°C", Package / Case="0402 (1005 Metric)", Ratings="16V; X7R", Supplier Part Number 1=478-1114-1-ND, Tolerance=±10%, ComponentLink1Description=http://www.avx.com/docs/Catalogs/cx7r.pdf, ComponentLink1URL=http://www.avx.com/docs/Catalogs/cx7r.pdf, ComponentLink2Description=http://www.yageo.com/documents/recent/UPY-GPHC_X7R_6.3V-to-50V_8.pdf, ComponentLink2URL=http://www.yageo.com/documents/recent/UPY-GPHC_X7R_6.3V-to-50V_8.pdf, Size / Dimension="0.039\" L x 0.020\" W (1.00mm x 0.50mm)", Supplier 1=Digi-Key, Supplier 2=Digi-Key, Supplier Part Number 2=311-1042-1-ND
C34 C35 C36 C37: library part CAPC_560p_0603_5%, "Capacitor SMD Cer 560pF 5% 50V NP0 0603", Capacitance=470pF, Manufacturer 1="AVX Corporation", Manufacturer Part Number 1=06035A561JAT2A, Operating Temperature="-55°C ~ 125°C", Package / Case="0603 (1608 metric)", Ratings="50V; NP0", Supplier Part Number 1=478-1184-1-ND, Voltage - Rated=50V, Applications="General Purpose", ComponentLink1Description=http://www.avx.com/docs/Catalogs/ccog.pdf, ComponentLink1URL=http://www.avx.com/docs/Catalogs/ccog.pdf, Height - Seated (Max)=-, Lead Spacing=-, Lead Style=-, Material=ceramic, Mounting Type="Surface Mount, MLCC", Size / Dimension="0.063\" L x 0.032\" W (1.60mm x 0.81mm)", Supplier 1=Digi-Key, Thickness (Max)="0.035\" (0.90mm)"
J1: library part SMD_Jumper
J1: library part LSHM-130-xx, "Samtec 0.5mm 60 pin Connector"
J3: "Hiros 60 pin Connector"
L2 L3: library part inductor_smd
L4 L7: library part SMD_Test_Point, "SMD Test Point"
LED2: library part LED_SMD_Red_0603_220mcd, "LED 0603 SMD Hyper Red 630nm 220mcd 20mA", Manufacturer 1="Kingbright Corp", Manufacturer Part Number 1=APT1608SURCK, Package / Case="0603 (1608 metric)", Ratings="220 mcd; 630 nm", Supplier Part Number 1=754-1123-1-ND, Voltage - Forward (Vf) @ 10mA=1.9V, Voltage - Forward (Vf) Typ=1.95V, Material="AlGaInP on GaAs", Supplier 1=Digi-Key
P1: library part Header_7Pin
R1 R2 R3 R4 R5 R6 R7 R8 R9 R12 R13 R15 R16 R23 R24 R25 R26 R27 R28: library part RES_3K3_0402_5%, "Resistor SMD chip 3.3k Ohm 0.063W 5% 0402", Manufacturer 1=Yageo, Manufacturer Part Number 1=RC0402JR-073K3L, Package / Case="0402 (1005 metric)", Ratings="1/16 W", Supplier Part Number 1=311-3.3KJRCT-ND, Tolerance=±5%, ComponentLink1Description=http://www.yageo.com/documents/recent/PYu-RC0402_51_RoHS_L_6.pdf, ComponentLink1URL=http://www.yageo.com/documents/recent/PYu-RC0402_51_RoHS_L_6.pdf, Material="Thick Film", Supplier 1=Digi-Key
U1: "FPGA CorsslinkNX  LIFCL-40-9BG256C"
U2 U21: "HyperRAM 16Mx8"
U3: library part MCP1725, "LDO"
U4: library part MX25L12833F, "Flash 128Mbit for Lattice FPGA"

## Free pads (board coordinates)
  round 4.45 hole 2.32: Q5(2.5,24.5) Q6(24.5,24.5) Q7(24.5,2.5) Q8(2.5,2.5)

## Via types
v1: diameter 0.45, hole 0.2, Signal_T to Signal_B, tented both sides, 340 vias
v2: diameter 0.7, hole 0.3, Signal_T to Signal_B, tented both sides, 2 vias
v3: diameter 0.45, hole 0.2, Signal_T to Signal_B, tented top, 1 vias

## Nets (pads, with @x,y where several pads share a name; then routed paths per layer and width w, separated by ;. In a path a pad name is that pad's centre, name@x,y a point inside that pad or via, vN(x,y) a via of type N, cw(c..) or ccw(c..) an arc to the next point about the centre after c; other vN are vias at no path point)
+5V: C1.2 C23.2 C26.2 C34.1 C36.1 J1.1@24.83,19.3 J1.2@22.17,19.3 J1.3 J1.4 J1.5 J1.6 J1.7 J1.8 J3.1 J3.2 J3.3 J3.4 J3.5 J3.6 J3.7 J3.8 J3.9 J3.10 U3.1 U3.2 U3.3 U7.1 U7.4 U11.1 U11.4 | length 15.3
  Signal_T w0.203: J1.6@22.17,18.5 21.488,18.5 ; J1.4@22.17,18.9 21.488,18.9 ; J1.2@22.17,19.3 21.488,19.3 21.488,18.9 ; v1@22.887,18.181 22.765,18.181 22.698,18.113 22.183,18.113 J1.8@22.17,18.1 21.488,18.1 21.488,18.5 ; 21.488,18.5 21.488,18.9
  Signal_INT w0.381: v1@0.381,5.039 0.381,7.248 ; 0.381,6.248 v1@0.381,8.458 ; v1@0.406,13.861 v1@0.406,16.07
  Signal_B w0.305: U3.1@4.341,16.137 3.353,16.137 C1.2@3.353,16.637 ; U3.2@4.341,16.637 C1.2@3.353,16.637 ; U3.3@4.341,17.137 3.353,17.137 C1.2@3.353,16.637
  other v1: 0.406,5.131 0.406,5.982 1.117,6.661 3.351,6.661 0.406,6.833 1.56,7.247 2.959,7.256 0.406,7.683 0.406,8.534 0.432,13.665 0.432,14.445 0.432,15.224 3.374,15.364 1.093,15.45 1.484,15.822 2.939,15.899 0.384,16.004 25.56,18.213 26.597,18.213 22.936,18.357 24.049,18.357 26.089,18.716 23.491,18.81 25.56,19.209 26.597,19.209 22.936,19.227 24.049,19.227 17.805,22.892 19.226,22.892 18.513,23.195 17.799,23.498 19.226,23.52 18.513,23.801 17.767,24.105 19.226,24.105
CAM_CLK: J3.40
CSS: U1.C15 U4.1 | length 6.2
  Signal_T w0.127: v1(20.214,22.356) 20.276,22.294 20.4,22.294 20.586,22.108 21.23,22.108 U4.1@21.302,22.036
  Signal_T w0.24: U1.C15@18.58,18.013 v1@18.974,18.407
  Signal_INT w0.127: v1(18.984,18.407) 19.439,18.862 19.439,20.252 20.273,21.086 v1@20.273,22.309
DONE: LED2.K U1.B16 | length 4.1
  Signal_T w0.24: U1.B16@19.38,18.813 19.401,18.813 19.755,19.167 19.815,19.167 v1(19.855,19.207)
  Signal_B w0.102: v1(19.855,19.207) 20.365,19.207 21.121,19.963 22.972,19.963 LED2.K@23.021,20.012
DQ0_MOSI: U1.C14 U4.5 | length 11.5
  Signal_T w0.127: v1(12.939,25.797) 12.939,25.824 13.032,25.918 13.876,25.918 U4.5@13.948,25.846
  Signal_T w0.24: U1.C14@17.78,18.013 v1@18.174,18.407
  Signal_INT w0.127: v1(12.939,25.797) 12.963,25.797 14.924,23.837 15.332,23.428 15.332,22.916 15.782,22.467 15.782,20.321 16.492,19.61 16.96,19.61 17.119,19.451 17.14,19.451 v1(18.184,18.407)
DQ1_MISO: U1.D16 U4.2 | length 8.9
  Signal_T w0.127: v1(20.197,23.31) 21.298,23.31 U4.2@21.302,23.306
  Signal_T w0.24: U1.D16@19.372,17.22 v1@19.766,16.826
  Signal_INT w0.127: v1(19.807,16.871) 19.807,17.222 19.613,17.415 19.613,17.774 19.857,18.018 20.055,18.018 20.455,18.418 20.455,20.43 20.629,20.604 20.629,22.559 20.197,22.992 v1(20.197,23.31)
DQ2: U1.D15 U4.3 | length 10.6
  Signal_T w0.102: U1.D15@18.579,17.22 18.961,17.602 v1(20.029,17.602)
  Signal_T w0.127: v1(20.227,24.063) 20.463,24.063 20.976,24.576 U4.3@21.302,24.576
  Signal_T w0.24: U1.D15@18.58,17.213 18.974,17.607
  Signal_INT w0.127: v1(20.029,17.602) 20.181,17.602 20.709,18.13 20.709,20.252 20.895,20.438 20.895,23.395 v1(20.227,24.063)
DQ3: U1.D12 U4.7 | length 9.6
  Signal_T w0.127: v1(13.7,23.927) 13.7,23.543 13.937,23.306 U4.7@13.948,23.306
  Signal_T w0.24: U1.D12@16.18,17.214 v1@16.574,17.608
  Signal_INT w0.127: v1(13.7,23.927) 13.691,23.918 13.691,23.145 15.274,21.562 15.274,20.11 16.282,19.102 16.749,19.102 17.159,18.692 17.159,18.183 v1(16.584,17.608)
ENABLE: J3.18 U1.F16 | length 12.9
  Signal_T w0.102: v1(16.298,23.343) 16.298,22.916 17.728,21.486 19.532,21.486 20.782,20.235 20.782,16.496 19.906,15.62 U1.F16@19.379,15.62
  Signal_B w0.127: J3.18@16.103,22.014 16.103,22.653 16.307,22.857 16.307,23.334 v1(16.298,23.343)
FPGA_1V0: C12.2 C13.2 C14.2 C15.2 C16.2 C27.2 C37.1 L3.2 R12.2 U1.B15 U1.D7 U1.D9 U1.H7 U1.J10 U1.K9 | length 18
  Signal_T w0.24: U1.H7@12.159,14.046 v1@12.553,13.652 ; U1.D7@12.172,17.22 v1@12.566,16.826 ; v1@13.385,16.834 U1.D9@13.779,17.228 ; U1.K9@13.81,12.395 v1@14.204,12.001 ; U1.J10@14.58,13.226 v1@14.974,13.62 ; U1.B15@18.58,18.813 v1@18.974,19.207
  Signal_T w0.381: L3.2@4.219,19.707 4.355,19.571 4.355,19.347 4.355,18.114 ; 4.394,18.114 4.394,16.653 R12.2@4.464,16.583
  Signal_T w0.508: L3.2@4.355,19.571 4.394,19.531 4.394,18.114 ; v1@4.579,18.114 4.804,17.89 C27.2@5.639,17.89
  Signal_INT w0.762: 5.475,19.678 5.475,21.888
  Signal_B w0.381: C12.2@12.54,16.053 12.54,16.771 12.566,16.798 v1(12.566,16.816) 12.575,16.825 13.366,16.825 v1(13.375,16.834) ; v1(12.553,13.642) 12.566,13.629 12.566,13.591 13.326,12.831 C15.2@13.376,12.831 13.426,12.831 14.748,11.509 14.792,11.509 14.929,11.372 14.929,11.322 C16.2@14.872,11.379 ; v1(13.375,16.834) C13.2@13.376,17.576 ; v1(14.204,11.991) v1@14.217,11.978 ; C14.2@14.827,14.324 14.903,14.324 14.962,14.265 14.962,14.215 14.971,14.206 14.971,13.633 v1(14.984,13.62)
  other v1: 4.67,18.222 18.984,19.207 5.244,19.655 5.385,20.218 5.385,20.853 5.385,21.463 5.715,21.92
FPGA_1V8: C24.2 C29.2 C30.2 C33.2 C35.1 C43.2 C44.2 C45.2 FB2.2 FB3.2 FB4.2 L2.2 P1.7 R3.1 R4.1 R5.1 R6.1 R7.2 R8.2 R16.1 R23.2 R24.1 R25.1 R28.1 U1.B11 U1.B13 U1.E3 U1.L14 U2.B4 U2.D1 U2.E4 U4.8 U21.B4 U21.D1 U21.E4 | length 54.6
  Signal_T w0.229: U2.B4@8.045,4.191 v1@8.439,3.797 ; U2.E4@11.045,4.191 11.068,4.215 11.068,4.479 11.215,4.626 v1(11.215,4.686)
  Signal_T w0.24: U1.E3@8.979,16.42 v1@9.374,16.815 ; U2.D1@10.045,1.191 10.05,1.191 10.535,1.676 v1(10.541,1.676) ; U1.B11@15.385,18.77 15.391,18.777 15.408,18.777 15.803,18.382 v1(15.803,18.366) ; v1(16.016,3.748) 16.016,3.839 16.357,4.18 U21.B4@16.357,4.191 ; v1(16.596,20.276) 16.593,20.274 16.593,19.207 16.978,18.822 U1.B13@17,18.822 ; U1.L14@17.772,11.631 17.799,11.631 18.083,11.347 v1@18.158,11.347 ; U21.E4@19.357,4.191 19.357,4.163 v1@19.761,3.759
  Signal_T w0.254: L2.2@4.318,10.16 L2.2@4.318,10.55 ; v1@13.65,21.353 v1@14.539,21.353 ; U4.8@13.948,22.036 14.243,22.036 14.421,21.858 14.421,21.471 v1@14.539,21.353 ; v1@14.421,21.353 v1@14.539,21.353 ; v1(14.604,21.239) 14.604,21.288 v1@14.539,21.353
  Signal_T w0.305: U21.D1@18.357,1.191 18.357,0.915 18.567,0.704 v1(18.567,0.686)
  Signal_T w0.381: L2.2@4.191,11.176 4.191,10.677 L2.2@4.318,10.55 ; L2.2@4.318,10.16 v1(4.318,8.763) 4.318,8.035 C24.2@4.443,8.035 ; v1(20.726,5.055) 20.739,5.042 20.739,4.534 v1(20.752,4.521)
  Signal_INT w0.152: v1(22.428,26.416) 21.924,25.912 21.924,21.645 v1(22.741,20.828)
  Signal_INT w0.762: v1@5.546,9.794 v1@5.546,12.004
  Signal_B w0.102: 19.529,17.996 19.577,18.043 20.427,18.043 20.591,18.208 20.591,18.793 21.196,19.398 R24.1@21.641,19.398
  Signal_B w0.152: R16.1@19.136,17.602 19.529,17.996 19.529,18.723 19.431,18.821 19.431,19.338 19.777,19.685 20.534,19.685 21.031,20.181 22.094,20.181 v1(22.741,20.828) ; P1.7@21.292,26.295 21.355,26.359 22.371,26.359 v1(22.428,26.416)
  Signal_B w0.24: v1(16.485,21.234) 16.485,21.178 v1@16.596,21.066 ; v1@18.803,20.194 18.803,20.232 R23.2@19.361,20.789
  Signal_B w0.254: v1(13.572,21.264) 13.631,21.323 14.52,21.323 v1(14.604,21.239) ; v1@14.605,21.234 v1(16.485,21.234)
  Signal_B w0.305: v1(16.596,20.276) 16.596,20.78 ; v1@16.596,21.066 16.596,20.78 ; C43.2@17.275,20.78 16.596,20.78 ; R28.1@18.255,13.614 18.273,13.596 18.979,13.596 v1(18.997,13.578)
  Signal_B w0.381: v1(4.318,8.763) 4.318,8.744 4.347,8.715 R8.2@4.347,8.033 ; v1(8.527,3.714) ccw(c8.527,3.755) 8.568,3.755 C30.2@8.568,4.431 ; v1(11.215,4.686) 11.215,4.016 ccw(c11.294,4.016) C29.2@11.294,3.937 ; FB3.2@11.659,11.24 11.665,11.234 12.592,11.234 v1(12.598,11.227) ; R4.1@17.753,5.777 18.17,5.359 20.422,5.359 v1(20.726,5.055) ; C45.2@18.713,1.742 18.663,1.742 18.604,1.683 18.604,1.633 18.567,1.596 v1(18.567,0.686) 18.586,0.686 18.733,0.833 19.865,0.833 ; v1@20.739,4.534 v1@20.739,5.042
  Signal_B w0.457: R3.1@6.441,11.626 6.441,10.772 6.552,10.66 6.552,10.573 7.064,10.061 7.369,10.061 8.247,9.182 8.286,9.144 8.286,9.059 8.305,9.039 8.305,8.06 R7.2@8.59,7.776 ; C33.2@9.322,15.977 9.322,16.815 v1(9.383,16.815) ; R16.1@19.136,17.602 19.147,17.59 19.147,16.801 19.147,15.997 R25.1@19.159,15.985
  other v1: 5.486,0.584 19.783,3.758 5.116,9.496 5.951,9.551 5.476,9.986 5.972,10.38 5.333,10.576 5.739,11.017 18.162,11.316 5.315,11.458 5.7,11.899 5.298,12.34 4.059,13.255 6.198,13.411 18.996,16.801 18.854,20.194
FPGA_CLK: J1.33 U1.P15 | length 9.4
  Signal_T w0.102: v1(23.931,11.271) 23.953,11.293 23.953,11.638 24.148,11.833 24.148,12.697 24.351,12.9 J1.33@24.83,12.9
  Signal_T w0.24: U1.P15@18.56,9.245 18.56,9.236 18.956,8.84 v1@18.956,8.837
  Signal_B w0.102: v1(18.956,8.82) 18.956,9.38 19.21,9.635 20.09,9.635 20.218,9.506 22.454,9.506 23.657,10.709 23.657,10.997 v1(23.931,11.271)
FPGA_CTL0: J1.25 U1.J16 | length 9.2
  Signal_T w0.102: J1.25@24.83,14.5 24.841,14.489 25.818,14.489 v1(26.004,14.303)
  Signal_T w0.24: U1.J16@19.379,13.22 19.476,13.22 19.91,13.655 v1(19.955,13.655)
  Signal_B w0.102: v1(19.955,13.655) 19.979,13.655 20.193,13.868 20.422,13.868 21.116,13.174 22.058,13.174 22.235,13.351 22.684,13.351 23.698,14.365 23.98,14.365 24.327,14.712 24.697,14.712 25.107,14.303 v1(26.004,14.303)
FPGA_CTL1: J1.29 U1.M14 | length 9.2
  Signal_T w0.102: v1(23.901,13.998) 23.913,14.009 23.997,14.009 24.099,13.907 24.128,13.907 24.345,13.69 24.82,13.69 J1.29@24.83,13.7
  Signal_T w0.24: U1.M14@17.772,10.82 17.802,10.82 18.139,10.483 v1(18.161,10.483)
  Signal_B w0.102: v1(18.161,10.483) 18.193,10.516 18.521,10.516 19.759,11.754 19.996,11.754 20.295,11.455 20.853,11.455 21.223,11.825 21.356,11.825 21.517,11.986 21.724,11.986 22.268,12.53 22.268,12.861 22.413,13.006 22.897,13.006 23.853,13.962 23.865,13.962 v1(23.901,13.998)
FPGA_D0: J1.15 U1.H13 | length 9.2
  Signal_T w0.127: v1(24.03,16.381) 24.118,16.381 24.236,16.5 J1.15@24.83,16.5
  Signal_T w0.24: U1.H13@16.968,14.01 v1@17.362,14.404
  Signal_B w0.102: v1(17.371,14.404) 17.801,14.834 18.445,14.834 18.907,15.295 19.779,15.295 20.683,16.199 20.986,16.199 21.363,16.577 21.853,16.577 22.231,16.199 23.306,16.199 23.488,16.381 v1(24.03,16.381)
FPGA_D1: J1.13 U1.H12 | length 10
  Signal_T w0.102: v1@23.6,16.789 23.716,16.905 24.825,16.905 J1.13@24.83,16.9
  Signal_T w0.24: U1.H12@16.193,14.023 v1@16.587,14.417
  Signal_INT w0.127: v1(16.597,14.417) 17.055,14.876 17.217,14.876 18.029,15.688 20.038,15.688 21.332,16.982 23.228,16.982 23.308,16.902 23.488,16.902 v1@23.6,16.789
  other v1: 23.6,16.84
FPGA_D2: J1.40 U1.N12 | length 9.3
  Signal_T w0.102: J1.40@22.17,11.7 23.08,11.7 23.166,11.613 v1(23.235,11.613)
  Signal_T w0.24: U1.N12@16.172,10.033 16.172,10.017 16.566,9.623 v1(16.566,9.613)
  Signal_B w0.102: v1(16.566,9.613) 16.601,9.613 17.033,10.045 18.558,10.045 19.13,10.617 20.314,10.617 20.462,10.469 20.858,10.469 20.879,10.491 21.28,10.491 22.006,11.216 22.914,11.216 23.235,11.537 v1(23.235,11.613)
FPGA_D3: J1.17 U1.H14 | length 9.3
  Signal_T w0.102: v1(23.991,15.805) 24.286,16.1 J1.17@24.83,16.1 J1.17@24.866,16.064
  Signal_T w0.24: U1.H14@17.779,14.02 v1@18.174,14.415
  Signal_B w0.102: v1(18.183,14.415) 18.277,14.415 18.376,14.513 18.415,14.513 18.933,15.031 20.058,15.031 21.033,16.006 21.625,16.006 22.08,16.006 cw(c22.08,15.885) 22.201,15.885 22.201,15.441 ccw(c22.322,15.441) 22.322,15.32 22.484,15.32 ccw(c22.484,15.441) 22.605,15.441 22.605,15.885 cw(c22.726,15.885) 22.726,16.006 23.241,16.006 23.758,16.006 23.959,15.805 v1(23.991,15.805)
FPGA_D4: J1.22 U1.L11 | length 9.5
  Signal_T w0.127: v1(20.932,15.023) 21.331,15.023 21.332,15.022 21.444,15.022 21.723,15.3 J1.22@22.17,15.3
  Signal_T w0.24: U1.L11@15.37,11.621 v1@15.764,11.227
  Signal_INT w0.127: v1@15.764,11.218 16.83,12.284 19.714,12.284 20.642,13.212 20.642,14.726 20.932,15.016 v1(20.932,15.023)
  other v1: 15.764,11.22
FPGA_D5: J1.30 U1.M12 | length 9.4
  Signal_T w0.102: v1(21.002,12.221) 21.002,13.001 21.701,13.7 J1.30@22.17,13.7
  Signal_T w0.24: U1.M12@16.172,10.82 16.187,10.82 16.559,10.449 v1(16.566,10.449)
  Signal_B w0.102: v1(16.566,10.449) 16.606,10.449 16.991,10.834 17.96,10.834 18.047,10.921 18.471,10.921 20.492,12.942 21.132,12.942 21.291,12.783 21.291,12.382 21.231,12.322 21.198,12.322 21.096,12.221 v1(21.002,12.221)
FPGA_D6: J1.14 U1.J11 | length 9.6
  Signal_T w0.102: v1@21.459,17.458 21.459,17.095 21.653,16.9 J1.14@22.17,16.9
  Signal_T w0.24: U1.J11@15.368,13.21 v1@15.762,13.604
  Signal_INT w0.127: v1(15.771,13.604) 15.771,14.4 16.501,15.13 17.087,15.13 17.899,15.942 19.932,15.942 21.371,17.38 21.371,17.574 v1(21.433,17.636)
FPGA_D7: J1.26 U1.M11 | length 9.7
  Signal_T w0.102: v1(21.336,13.894) 21.336,14.054 21.718,14.436 22.106,14.436 J1.26@22.17,14.5
  Signal_T w0.24: U1.M11@15.385,10.82 v1@15.779,10.426
  Signal_INT w0.127: v1(15.779,10.415) 16.228,10.864 16.808,10.864 16.967,11.024 16.967,11.47 17.274,11.776 19.966,11.776 20.859,12.669 21.182,12.669 21.487,12.974 21.487,13.369 21.336,13.52 v1(21.336,13.894)
FPGA_D8: J1.16 U1.J12 | length 9.5
  Signal_T w0.127: J1.16@22.17,16.5 22.989,16.5 v1(23.055,16.567)
  Signal_T w0.24: U1.J12@16.168,13.21 v1@16.562,13.604
  Signal_INT w0.127: v1(16.571,13.604) 18.405,13.604 18.795,13.994 19.252,13.994 19.507,14.249 19.507,14.766 21.308,16.567 v1(23.055,16.567)
FPGA_D9: J1.28 U1.M13 | length 9.6
  Signal_T w0.102: J1.28@22.17,14.1 22.82,14.1 22.915,14.196 22.92,14.191 v1(23.005,14.191)
  Signal_T w0.24: U1.M13@16.985,10.82 16.994,10.82 17.365,10.449 v1(17.379,10.449)
  Signal_INT w0.127: v1(17.379,10.449) 17.829,10.899 18.656,10.899 19.263,11.506 20.98,11.506 21.565,12.09 21.565,12.692 21.919,13.047 22.136,13.047 22.262,12.92 22.475,12.92 22.675,13.12 22.675,13.291 22.548,13.418 22.548,13.734 v1(23.005,14.191)
FPGA_D10: J1.18 U1.J15 | length 9.5
  Signal_T w0.102: J1.18@22.17,16.1 22.752,16.1 23.507,15.345 v1(23.513,15.345)
  Signal_T w0.24: U1.J15@18.558,13.231 v1@18.952,12.836
  Signal_INT w0.127: v1(18.952,12.827) 19.897,12.827 20.388,13.317 20.388,15.287 21.109,16.009 22.843,16.009 23.507,15.345 v1(23.513,15.345)
FPGA_D11: J1.19 U1.H15 | length 9.1
  Signal_T w0.102: J1.19@24.83,15.7 24.834,15.696 25.485,15.696 v1(25.721,15.932)
  Signal_T w0.24: U1.H15@18.571,14.012 18.575,14.012 18.972,14.409 v1(18.975,14.409)
  Signal_B w0.102: v1(18.975,14.409) 18.978,14.409 19.32,14.751 20.392,14.751 20.626,14.517 22.332,14.517 22.566,14.751 23.577,14.751 24.523,15.697 25.486,15.697 v1(25.721,15.932)
FPGA_D12: J1.20 U1.L12 | length 9.5
  Signal_T w0.127: v1(21.281,15.594) 21.369,15.594 21.475,15.7 J1.20@22.17,15.7
  Signal_T w0.24: U1.L12@16.172,11.623 16.192,11.623 16.536,11.28 v1(16.552,11.28)
  Signal_INT w0.127: v1(16.552,11.28) 16.614,11.341 16.614,11.475 16.713,11.575 17.169,12.03 19.819,12.03 20.896,13.107 20.896,14.199 21.575,14.878 21.575,15.3 v1(21.281,15.594)
FPGA_D13: J1.21 U1.H16 | length 9.1
  Signal_T w0.102: J1.21@24.83,15.3 v1@26.053,15.3
  Signal_T w0.24: U1.H16@19.379,14.02 19.409,14.02 19.701,14.312 19.932,14.312 v1(19.972,14.352)
  Signal_B w0.102: v1(19.972,14.352) 20,14.324 22.412,14.324 22.645,14.558 23.727,14.558 24.548,15.379 24.926,15.379 25.036,15.269 25.036,14.908 25.178,14.767 25.49,14.767 25.857,15.133 25.87,15.133 v1@26.028,15.291
  other v1: 26.076,15.245
FPGA_D14: J1.32 U1.M15 | length 9.1
  Signal_T w0.102: J1.32@22.17,13.3 22.689,13.3 23.08,13.691 23.47,13.691 23.622,13.538 23.774,13.538 24.003,13.31 v1(24.079,13.31)
  Signal_T w0.127: 19.005,10.4 19.822,10.4 20.233,10.812 20.677,10.812 v1(20.702,10.837)
  Signal_T w0.24: U1.M15@18.56,10.845 19.005,10.4
  Signal_B w0.102: v1(20.702,10.837) 20.84,10.837 20.844,10.833 22.734,12.724 22.979,12.724 23.564,13.31 v1(24.079,13.31)
FPGA_D15: J1.38 U1.N11 | length 9.9
  Signal_T w0.102: J1.38@22.17,12.1 22.175,12.095 23.068,12.095 v1(23.114,12.141)
  Signal_T w0.24: U1.N11@15.359,10.033 v1@15.753,9.638
  Signal_INT w0.127: v1(15.753,9.629) 15.753,9.632 16.155,10.033 18.005,10.033 18.04,10.068 18.729,10.068 19.914,11.252 22.225,11.252 v1(23.114,12.141)
FPGA_D16: J1.47 U1.P14 | length 9.8
  Signal_T w0.102: v1(24.148,10.06) 24.153,10.055 24.785,10.055 J1.47@24.83,10.1
  Signal_T w0.24: U1.P14@17.772,9.22 v1@18.166,8.826
  Signal_INT w0.127: v1@18.161,8.839 18.242,8.759 18.371,8.759 18.725,8.405 20.038,8.405 20.282,8.648 20.769,9.136 22.852,9.136 23.199,8.788 24.384,8.788 24.765,9.169 24.765,9.512 24.217,10.06 v1(24.148,10.06)
  other v1: 18.161,8.82
FPGA_D17: J1.44 U1.P11 | length 9.5
  Signal_T w0.102: J1.44@22.17,10.9 22.631,10.9 v1(22.978,10.553)
  Signal_T w0.24: U1.P11@15.385,9.22 v1@15.779,8.826
  Signal_B w0.102: v1(15.779,8.82) 15.846,8.887 16.042,8.887 16.374,9.219 18.389,9.219 18.872,9.702 18.998,9.828 20.375,9.828 20.501,9.702 22.131,9.702 22.978,10.548 v1(22.978,10.553)
FPGA_D18: J1.37 U1.N15 | length 9.2
  Signal_T w0.102: 18.982,9.61 20.456,9.61 20.904,10.058 20.966,10.058 v1(21.031,10.124) ; J1.37@24.83,12.1 24.839,12.091 25.587,12.091 v1(25.596,12.082)
  Signal_T w0.24: U1.N15@18.56,10.033 18.982,9.61
  Signal_B w0.102: v1(21.031,10.124) 21.061,10.094 21.638,10.094 22.535,10.991 23.132,10.991 23.653,11.512 24.46,12.319 24.994,12.319 25.044,12.269 25.208,12.105 25.573,12.105 v1(25.596,12.082)
FPGA_D19: J1.43 U1.N14 | length 9.9
  Signal_T w0.127: J1.43@24.83,10.9 24.844,10.886 25.894,10.886 v1(25.908,10.871)
  Signal_T w0.24: U1.N14@17.772,10.033 v1@18.166,9.638
  Signal_INT w0.127: v1(18.212,9.652) 18.268,9.708 21.367,9.708 21.81,10.151 22.598,10.151 22.614,10.135 23.402,10.135 24.138,10.871 v1(25.908,10.871)
FPGA_D20: J1.54 U1.T12 | length 9.5
  Signal_T w0.102: 16.179,7.417 16.179,6.905 16.556,6.528 16.903,6.528 v1(16.913,6.537) ; J1.54@22.17,8.9 22.226,8.844 22.572,8.844 v1(22.981,8.435)
  Signal_T w0.24: 16.179,7.417 U1.T12@16.179,7.62
  Signal_INT w0.127: v1(16.913,6.537) 16.946,6.504 18.202,6.504 19.318,7.62 22.208,7.62 22.981,8.392 v1(22.981,8.435)
FPGA_D21: J1.39 U1.P16 | length 9.2
  Signal_T w0.102: J1.39@24.83,11.7 24.832,11.698 25.976,11.698 v1(25.997,11.718)
  Signal_T w0.24: U1.P16@19.373,9.22 19.41,9.22 19.743,8.887 19.826,8.887 v1@19.866,8.846
  Signal_B w0.102: v1@19.866,8.846 19.88,8.861 20.333,9.313 22.572,9.313 23.965,10.706 24.562,11.303 25.603,11.303 25.997,11.696 v1(25.997,11.718)
  other v1: 19.866,8.82
FPGA_D22: J1.49 U1.R13 | length 9
  Signal_T w0.102: v1(23.423,9.209) 23.463,9.169 23.945,9.169 24.477,9.7 J1.49@24.83,9.7
  Signal_T w0.24: U1.R13@16.991,8.419 v1@17.385,8.025
  Signal_B w0.102: v1@17.374,8.103 17.724,8.453 18.667,8.453 18.847,8.273 19.616,8.273 19.796,8.453 20.091,8.453 20.756,9.118 21.602,9.118 21.779,8.941 22.366,8.941 22.545,9.12 22.892,9.12 22.981,9.209 v1(23.423,9.209)
  other v1: 17.379,8.103
FPGA_D23: J1.45 U1.N13 | length 9.4
  Signal_T w0.102: v1(23.645,9.751) 23.645,10.304 23.841,10.5 J1.45@24.83,10.5
  Signal_T w0.24: U1.N13@16.994,10.013 v1@17.388,9.619
  Signal_INT w0.127: v1@17.409,9.595 17.767,9.236 18.533,9.236 18.73,9.433 19.522,9.433 19.694,9.262 20.453,9.262 20.645,9.454 21.472,9.454 21.915,9.897 22.361,9.897 22.751,9.507 23.133,9.507 23.377,9.751 v1(23.645,9.751)
  other v1: 17.379,9.595
FPGA_D24: J1.56 U1.T11 | length 9.8
  Signal_T w0.102: U1.T11@15.379,7.62 15.379,6.866 16.269,5.977 18.372,5.977 v1(18.466,6.071) ; v1(20.208,7.168) 20.193,7.183 20.193,7.928 20.393,8.128 20.698,8.128 20.898,7.928 21.098,7.928 21.647,8.477 22.147,8.477 J1.56@22.17,8.5
  Signal_T w0.24: 15.379,7.417 U1.T11@15.379,7.62
  Signal_INT w0.127: v1(18.466,6.071) 18.983,6.588 19.627,6.588 v1(20.208,7.168)
FPGA_D25: J1.51 U1.R14 | length 9.3
  Signal_T w0.102: J1.51@24.83,9.3 25.369,9.3 25.599,9.071 v1(25.626,9.071)
  Signal_T w0.24: U1.R14@17.781,8.424 17.806,8.424 18.144,8.086 v1(18.186,8.086)
  Signal_B w0.102: v1(18.186,8.086) 18.203,8.086 18.209,8.08 21.98,8.08 22.708,8.808 25.363,8.808 v1(25.626,9.071)
FPGA_D26: J1.60 U1.R11 | length 10.4
  Signal_T w0.102: U1.R11@15.379,8.42 15.789,8.011 15.789,6.73 16.349,6.17 17.625,6.17 18.048,6.592 18.63,6.592 v1(19.117,6.103) v1(19.117,6.103)
  Signal_T w0.127: v1(21.341,6.825) 21.463,6.947 21.463,7.493 21.67,7.7 J1.60@22.17,7.7
  Signal_T w0.24: U1.R11@15.379,8.42 15.774,8.026
  Signal_INT w0.127: v1(19.117,6.103) v1(19.117,6.103) 20.62,6.103 v1(21.341,6.825)
FPGA_D27: J1.58 U1.R12 | length 10
  Signal_T w0.102: U1.R12@16.179,8.42 16.604,7.996 16.604,7.003 v1(16.609,6.998) ; v1(20.72,6.825) 21.133,7.238 21.133,7.59 21.643,8.1 J1.58@22.17,8.1
  Signal_T w0.24: U1.R12@16.179,8.42 16.574,8.026
  Signal_B w0.102: v1(16.609,6.998) 16.61,6.999 16.97,6.999 17.529,6.44 18.421,6.44 18.812,6.831 19.166,6.831 19.589,6.408 19.881,6.408 20.269,6.02 20.65,6.02 20.828,6.198 20.828,6.41 20.786,6.452 20.786,6.759 v1(20.72,6.825)
FPGA_D28: J1.50 U1.R10 | length 9.6
  Signal_T w0.102: v1(21.311,8.721) 21.311,8.978 ; 21.311,8.978 21.311,9.358 21.653,9.7 J1.50@22.17,9.7
  Signal_T w0.24: U1.R10@14.572,8.432 v1@14.966,8.038
  Signal_INT w0.127: v1(14.966,8.029) 15.42,8.029 16.032,7.416 18.464,7.416 18.921,7.874 20.945,7.874 21.278,8.206 21.278,8.688 v1(21.311,8.721)
FPGA_D29: J1.53 U1.T13 | length 9.4
  Signal_T w0.102: v1(23.629,7.945) 23.695,8.012 23.695,8.329 24.266,8.9 J1.53@24.83,8.9
  Signal_T w0.24: U1.T13@16.979,7.62 16.979,7.591 17.537,7.033 v1(17.537,6.969)
  Signal_B w0.102: v1(17.537,6.969) 17.872,6.633 18.311,6.633 19.212,7.535 23.231,7.535 23.629,7.933 v1(23.629,7.945)
FPGA_D30: J1.46 U1.P10 | length 10.1
  Signal_T w0.102: v1@20.72,8.402 20.72,8.499 v1(20.766,8.545) ; v1@20.752,8.56 20.752,9.182 21.522,9.953 21.522,10.223 21.756,10.457 22.127,10.457 J1.46@22.17,10.5
  Signal_T w0.24: U1.P10@14.572,9.245 v1@14.966,8.851
  Signal_INT w0.127: v1@14.966,8.841 16.137,7.67 18.359,7.67 18.816,8.128 20.167,8.128 20.599,8.56 20.752,8.56 v1(20.766,8.545)
  other v1: 14.966,8.82
FPGA_D31: J1.52 U1.T14 | length 9.1
  Signal_T w0.102: U1.T14@17.779,7.62 U1.T14@17.818,7.582 ; J1.52@22.17,9.3 22.696,9.3 23.4,8.596 23.4,8.236 23.079,7.915 v1(23.079,7.902)
  Signal_T w0.24: U1.T14@17.815,7.584 17.8,7.57 18.071,7.299 18.071,7.041 v1(18.111,7.001)
  Signal_B w0.102: v1(18.111,7.001) 18.111,7.469 18.315,7.672 18.848,7.672 19.05,7.874 19.666,7.874 19.812,7.728 20.555,7.728 20.701,7.874 21.241,7.874 21.387,7.728 22.105,7.728 22.427,8.051 22.845,8.051 22.993,7.902 v1(23.079,7.902)
FPGA_L9: U1.L9